# EAGLE board panel_oshpark_femtoBeacon_r2.0.0 (EAGLE 7.5.0), part 1 of 14
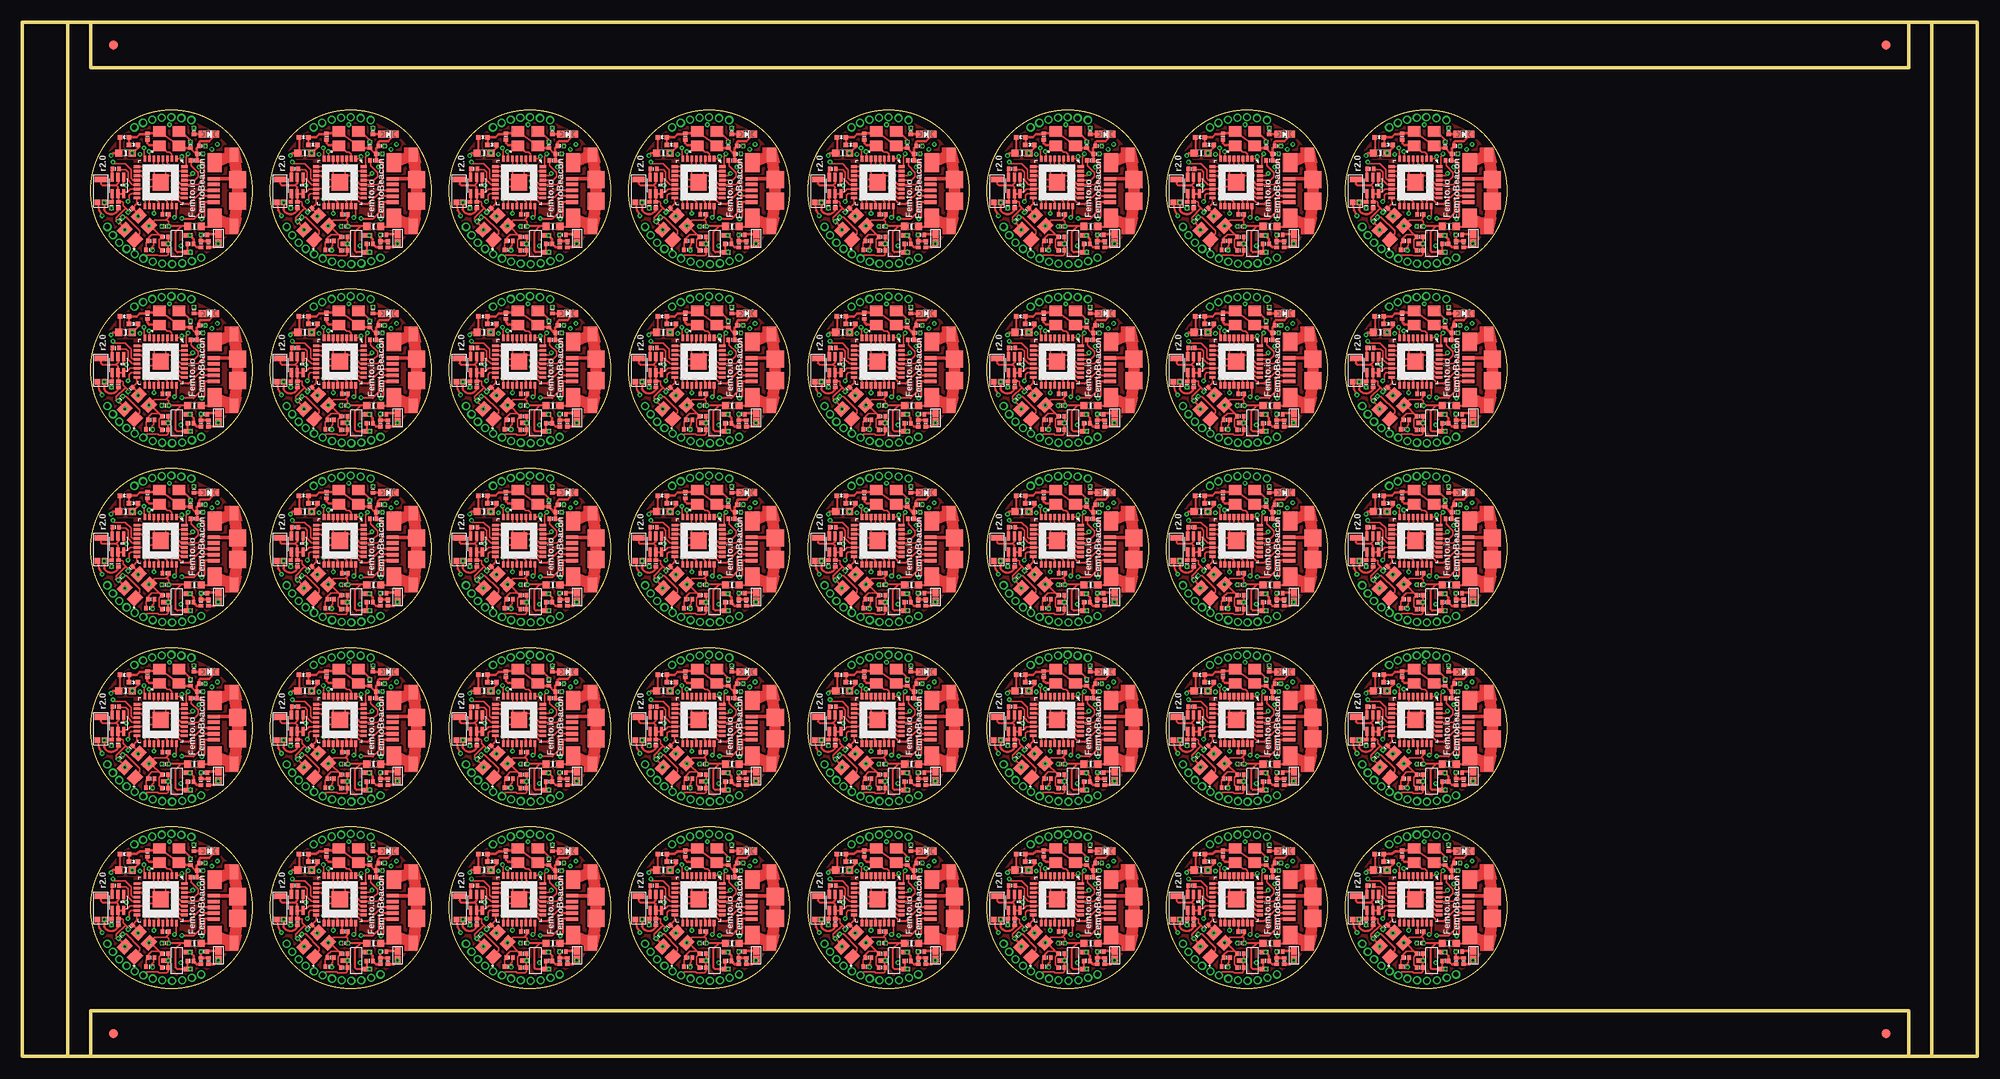
[diagram p0: board, top side]
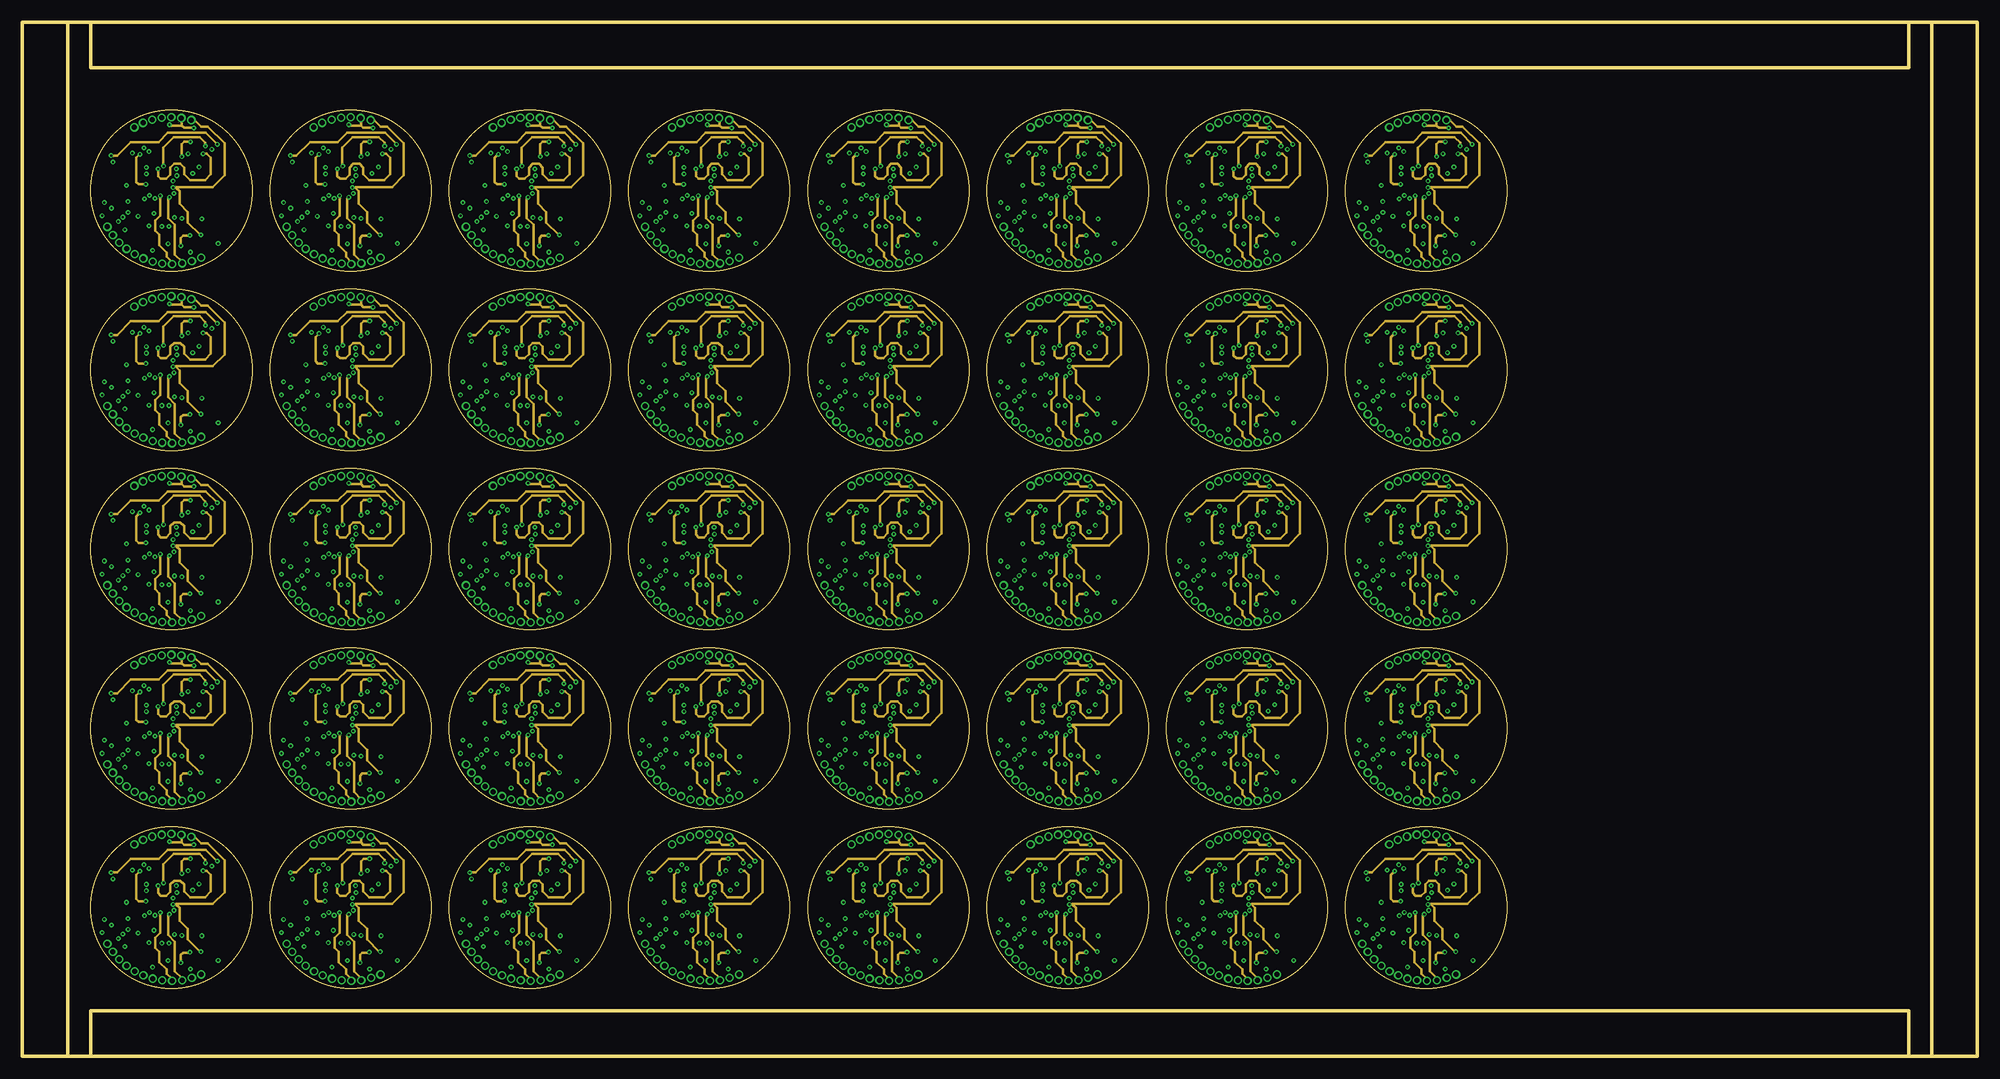
[diagram p1: board, inner layer Route2]
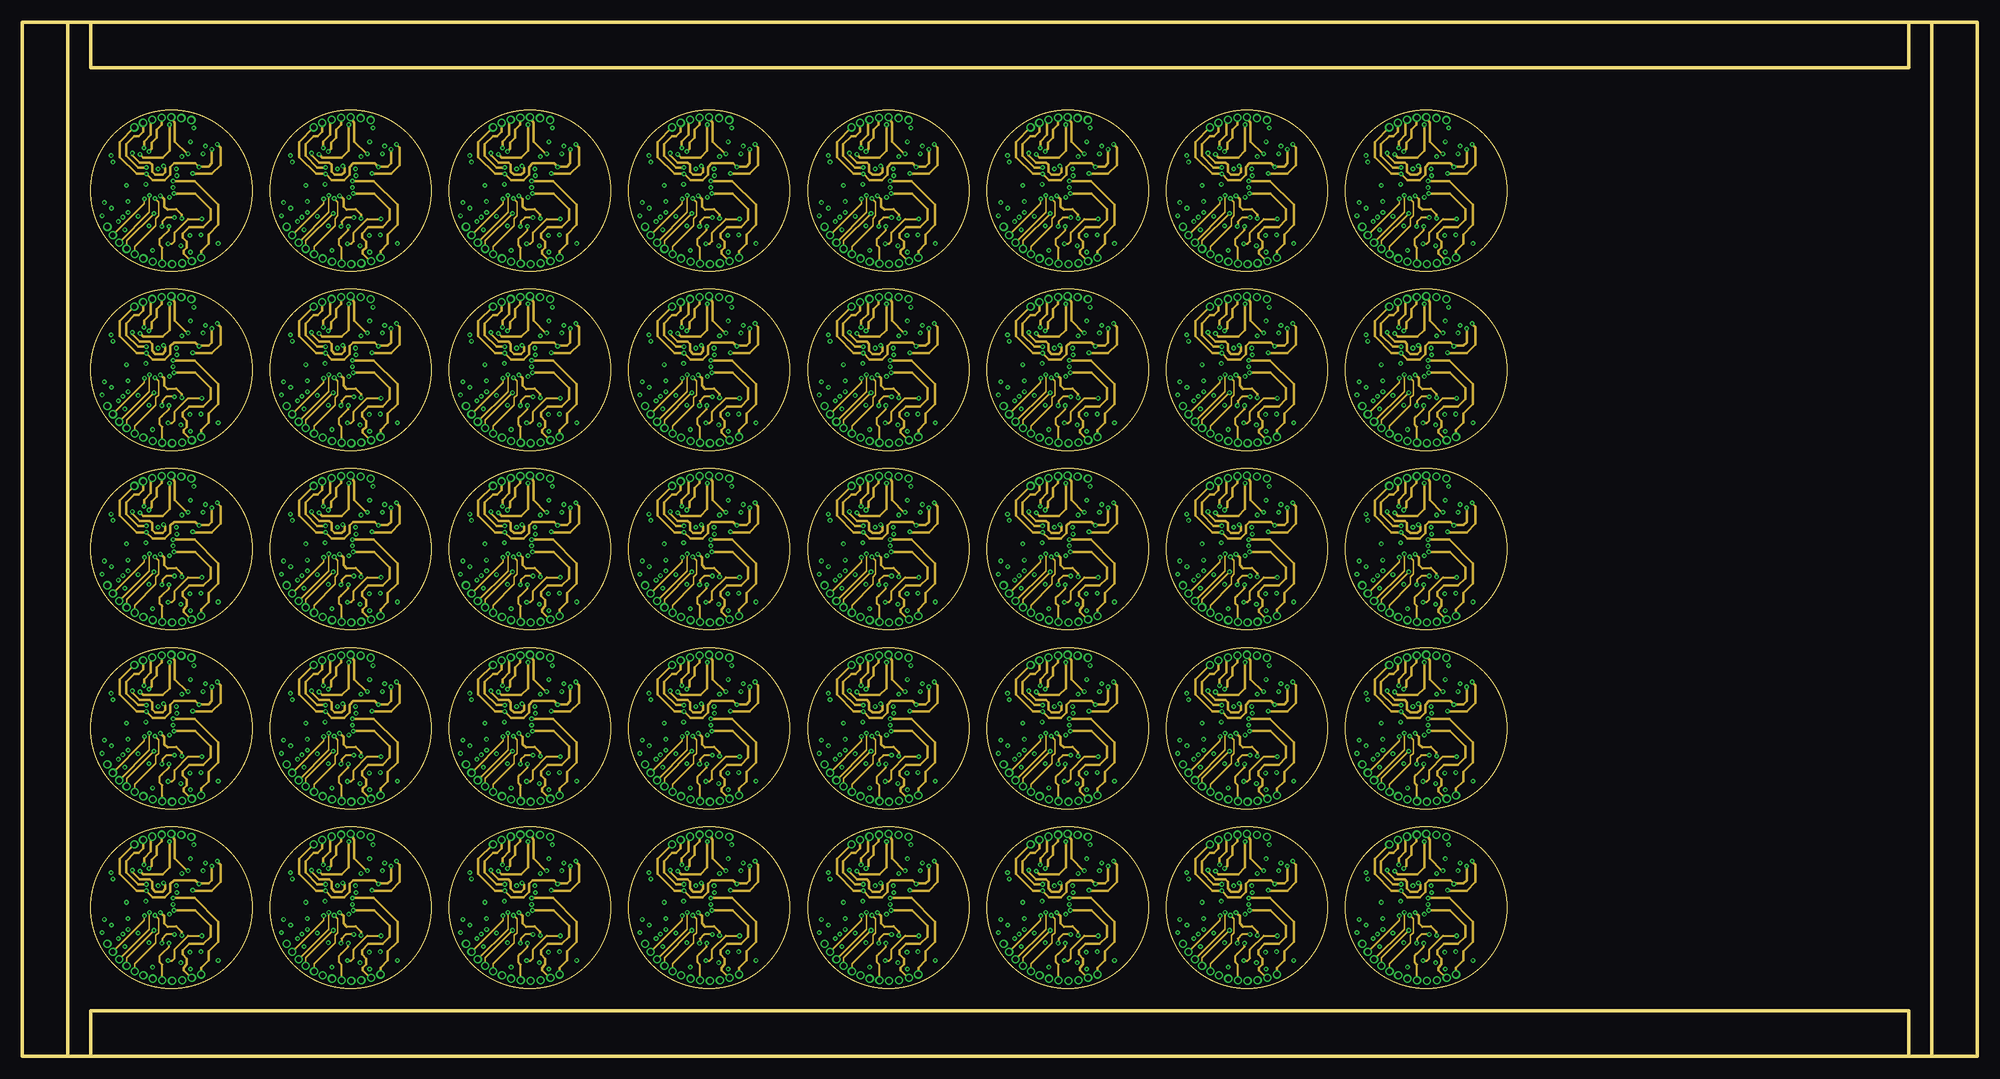
[diagram p2: board, inner layer Route15]
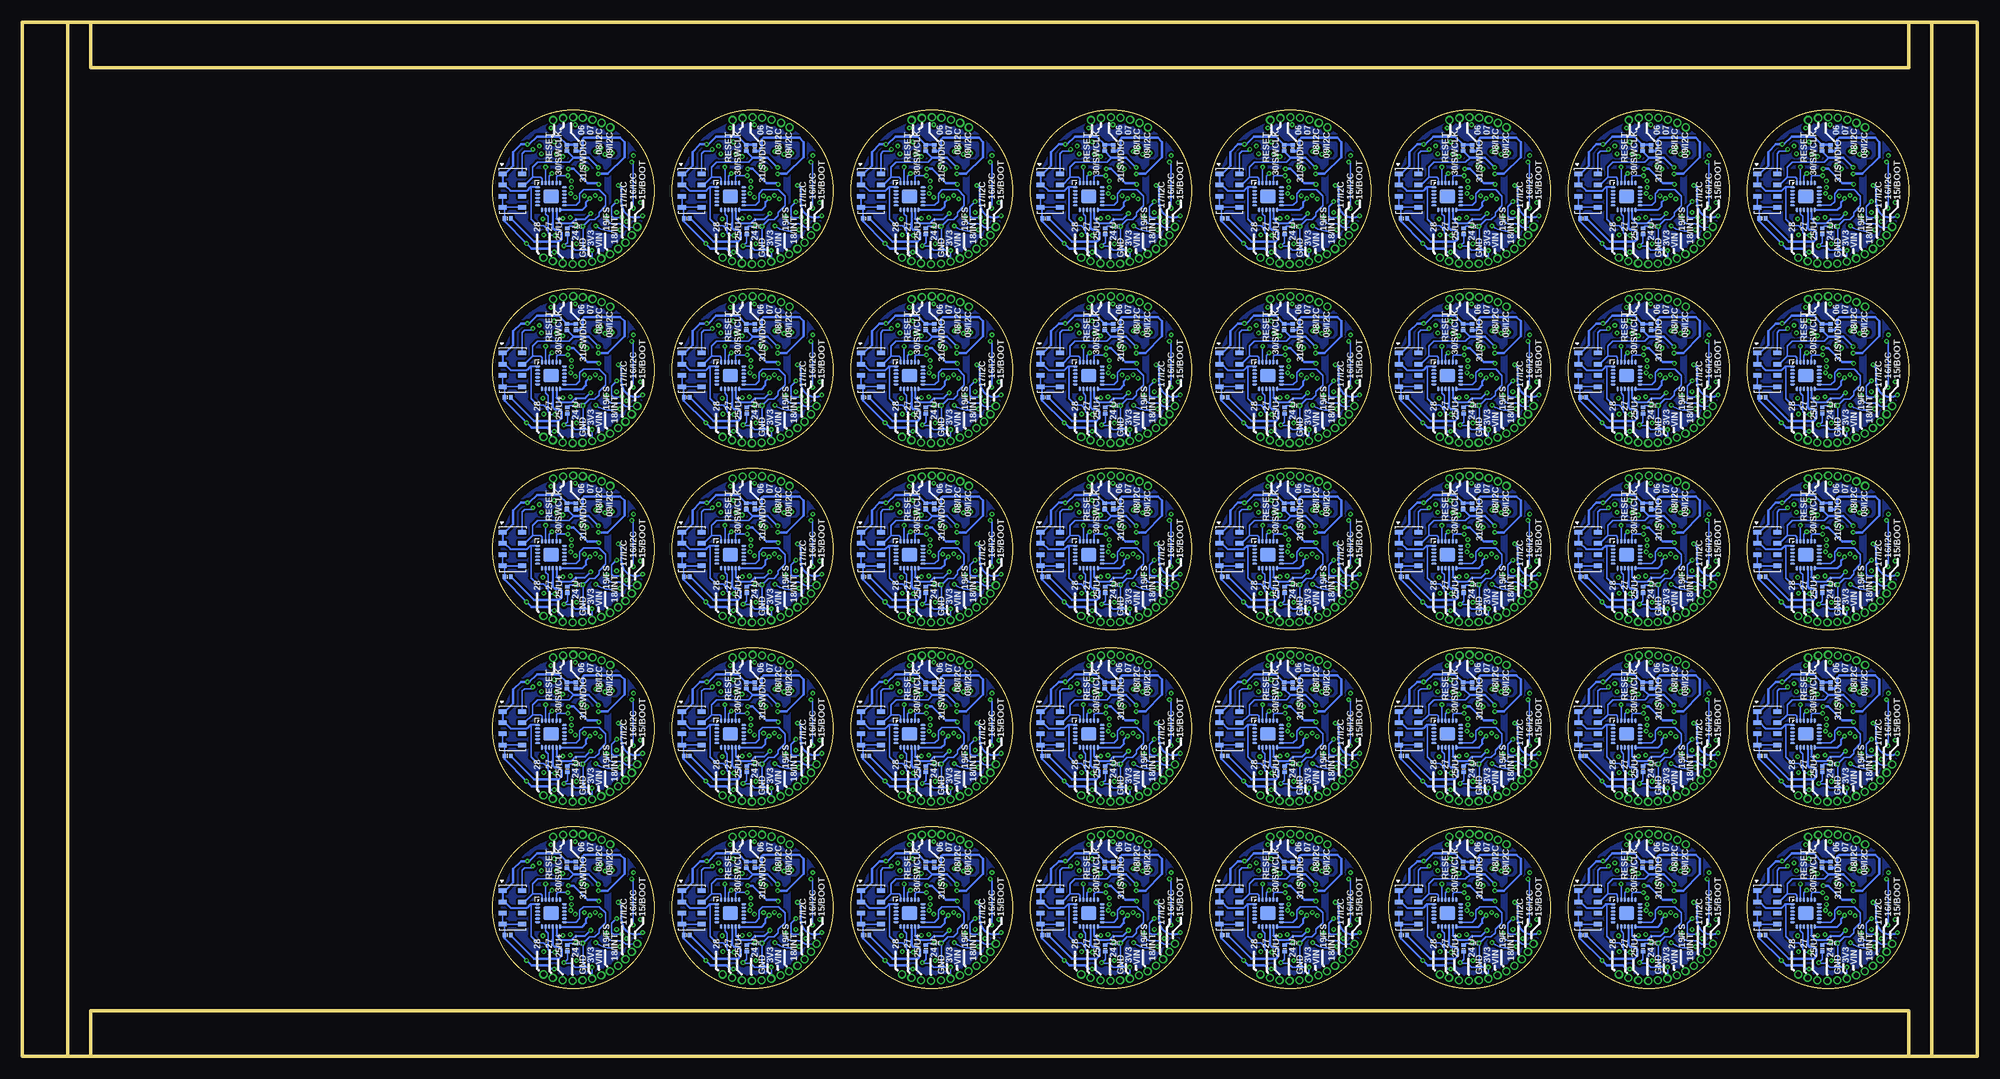
[diagram p3: board, bottom side, seen from below]

Size 218.08 x 115.39 mm. Coordinates in mm from the lower left corner, seen from the top.
Outline: 5.08,0 0,0 0,115.39 5.08,115.39
Outline: 5.08,0 5.08,115.39
Outline: 213,0 218.08,0 218.08,115.39 213,115.39
Outline: 213,0 213,115.39
Outline: 5.08,0 213,0
Outline: 5.08,115.39 213,115.39
Outline: 7.62,5.08 7.62,0 210.46,0 210.46,5.08 7.62,5.08
Outline: 7.62,115.39 7.62,110.31 210.46,110.31 210.46,115.39 7.62,115.39
Outline: circle at 16.62,16.62 radius 9
Outline: circle at 36.62,16.62 radius 9
Outline: circle at 56.62,16.62 radius 9
Outline: circle at 76.62,16.62 radius 9
Outline: circle at 96.62,16.62 radius 9
Outline: circle at 116.62,16.62 radius 9
Outline: circle at 136.62,16.62 radius 9
Outline: circle at 156.62,16.62 radius 9
Outline: circle at 16.62,36.62 radius 9
Outline: circle at 36.62,36.62 radius 9
Outline: circle at 56.62,36.62 radius 9
Outline: circle at 76.62,36.62 radius 9
Outline: circle at 96.62,36.62 radius 9
Outline: circle at 116.62,36.62 radius 9
Outline: circle at 136.62,36.62 radius 9
Outline: circle at 156.62,36.62 radius 9
Outline: circle at 16.62,56.62 radius 9
Outline: circle at 36.62,56.62 radius 9
Outline: circle at 56.62,56.62 radius 9
Outline: circle at 76.62,56.62 radius 9
Copper layers (1+2*15+16): Top 0.035mm / dielectric 0.7mm / Route2 0.035mm / dielectric 0.15mm / Route15 0.035mm / dielectric 0.2mm / Bottom 0.035mm
Design rules "AQS_custom_4layer": minimum track width 5mil, minimum drill 5mil, track to track 6mil, track to pad 6mil, pad to pad 6mil, via to via 6mil, smd to smd 1mil, copper to edge 15mil, drill to drill 6mil, minimum pad ring 7mil, minimum via ring 3mil, stop-mask expansion 2mil, vias tented up to drill 10mil, thermal gap 10mil

## Footprints (pad centres in the part's own frame; a part is rotated, then mirrored left to right if it is on the bottom)
ANT_BAR = smd 0.62 x 0.61: 1 -1.3,0.37; 2 -1.3,-0.38 | smd 0.62 x 1.36: 3 1.3,0
SPST_SMD = smd 0.889 x 0.699: 1 -0.508,0; 2 0.508,0
PART = smd 0.4 x 0.5: 1 -0.35,0; 2 0.35,0
_0402MP = smd 0.5 x 0.5: 1 -0.508,0; 2 0.508,0
_0603MP = smd 0.8 x 0.8: 1 -0.762,0; 2 0.762,0
FIDUCIAL_1MM = smd 1 x 1: 1 0,0
MCP1700T-3302E/TT = smd 0.5 x 1: GND -0.95,-1.25; VIN 0,1.25; VOUT 0.95,-1.25
CHIPLED_0603_NOOUTLINE = smd 0.8 x 0.8: A 0,-0.75; C 0,0.75
TSX-3225 = smd 1.4 x 1.15: 1 -1.1,-0.8; 2 1.1,-0.8; 3 1.1,0.8; 4 -1.1,0.8
1X1_ROUND = drill 0.559 pad 0.864: P$1 0,0
QFN_3X3MM = smd 0.6 x 0.25: P$1 -1.5,1; P$2 -1.5,0.6; P$3 -1.5,0.2; P$4 -1.5,-0.2; P$5 -1.5,-0.6; P$6 -1.5,-1; P$13 1.5,-1; P$14 1.5,-0.6; P$15 1.5,-0.2; P$16 1.5,0.2; P$17 1.5,0.6; P$18 1.5,1 | smd 0.25 x 0.6: P$7 -1,-1.5; P$8 -0.6,-1.5; P$9 -0.2,-1.5; P$10 0.2,-1.5; P$11 0.6,-1.5; P$12 1,-1.5; P$19 1,1.5; P$20 0.6,1.5; P$21 0.2,1.5; P$22 -0.2,1.5; P$23 -0.6,1.5; P$24 -1,1.5 | smd 1.7 x 1.54: P$25 0,0
0805_BALUN = smd 1 x 0.35: 1 -0.9,0.65; 2 -0.9,0; 3 -0.9,-0.65; 4 0.9,-0.65; 5 0.9,0; 6 0.9,0.65
MS5611-01BA03 = smd 0.9 x 0.5: 1 -1.1,1.875; 2 -1.1,0.625; 3 -1.1,-0.625; 4 -1.1,-1.875; 5 1.1,-1.875; 6 1.1,-0.625; 7 1.1,0.625; 8 1.1,1.875
QFN32 = smd 0.7 x 0.3: 1 -2.65,1.75; 2 -2.65,1.25; 3 -2.65,0.75; 4 -2.65,0.25; 5 -2.65,-0.25; 6 -2.65,-0.75; 7 -2.65,-1.25; 8 -2.65,-1.75; 17 2.65,-1.75; 18 2.65,-1.25; 19 2.65,-0.75; 20 2.65,-0.25; 21 2.65,0.25; 22 2.65,0.75; 23 2.65,1.25; 24 2.65,1.75 | smd 0.3 x 0.7: 9 -1.75,-2.65; 10 -1.25,-2.65; 11 -0.75,-2.65; 12 -0.25,-2.65; 13 0.25,-2.65; 14 0.75,-2.65; 15 1.25,-2.65; 16 1.75,-2.65; 25 1.75,2.65; 26 1.25,2.65; 27 0.75,2.65; 28 0.25,2.65; 29 -0.25,2.65; 30 -0.75,2.65; 31 -1.25,2.65; 32 -1.75,2.65 | smd 1.8 x 1.8: 33 0,0
USB_MICROB_PACKAGE = smd 0.4 x 1.35: 1 -1.3,1.47; 2 -0.64,1.47; 3 0,1.47; 4 0.66,1.47; 5 1.3,1.47 | smd 2.1 x 1.6: 6 -3.1,1.35; 11 3.1,1.35 | smd 1.6 x 1: 7 -4,-0.8; 10 4,-0.8 | smd 1.9 x 1.9: 8 -1.2,-1.2; 9 1.2,-1.2

## Placement (x,y rotation side)
ANT1  PULSE_ANT_2.4GHZ  [ANT_BAR]  8.76,16.59 90 top
ANT2  PULSE_ANT_2.4GHZ  [ANT_BAR]  28.76,16.59 90 top
ANT3  PULSE_ANT_2.4GHZ  [ANT_BAR]  48.76,16.59 90 top
ANT4  PULSE_ANT_2.4GHZ  [ANT_BAR]  68.76,16.59 90 top
ANT5  PULSE_ANT_2.4GHZ  [ANT_BAR]  88.76,16.59 90 top
ANT6  PULSE_ANT_2.4GHZ  [ANT_BAR]  108.76,16.59 90 top
ANT7  PULSE_ANT_2.4GHZ  [ANT_BAR]  128.76,16.59 90 top
ANT8  PULSE_ANT_2.4GHZ  [ANT_BAR]  148.76,16.59 90 top
ANT9  PULSE_ANT_2.4GHZ  [ANT_BAR]  8.76,36.59 90 top
ANT10  PULSE_ANT_2.4GHZ  [ANT_BAR]  28.76,36.59 90 top
ANT11  PULSE_ANT_2.4GHZ  [ANT_BAR]  48.76,36.59 90 top
ANT12  PULSE_ANT_2.4GHZ  [ANT_BAR]  68.76,36.59 90 top
ANT13  PULSE_ANT_2.4GHZ  [ANT_BAR]  88.76,36.59 90 top
ANT14  PULSE_ANT_2.4GHZ  [ANT_BAR]  108.76,36.59 90 top
ANT15  PULSE_ANT_2.4GHZ  [ANT_BAR]  128.76,36.59 90 top
ANT16  PULSE_ANT_2.4GHZ  [ANT_BAR]  148.76,36.59 90 top
ANT17  PULSE_ANT_2.4GHZ  [ANT_BAR]  8.76,56.59 90 top
ANT18  PULSE_ANT_2.4GHZ  [ANT_BAR]  28.76,56.59 90 top
ANT19  PULSE_ANT_2.4GHZ  [ANT_BAR]  48.76,56.59 90 top
ANT20  PULSE_ANT_2.4GHZ  [ANT_BAR]  68.76,56.59 90 top
ANT21  PULSE_ANT_2.4GHZ  [ANT_BAR]  88.76,56.59 90 top
ANT22  PULSE_ANT_2.4GHZ  [ANT_BAR]  108.76,56.59 90 top
ANT23  PULSE_ANT_2.4GHZ  [ANT_BAR]  128.76,56.59 90 top
ANT24  PULSE_ANT_2.4GHZ  [ANT_BAR]  148.76,56.59 90 top
ANT25  PULSE_ANT_2.4GHZ  [ANT_BAR]  8.76,76.59 90 top
ANT26  PULSE_ANT_2.4GHZ  [ANT_BAR]  28.76,76.59 90 top
ANT27  PULSE_ANT_2.4GHZ  [ANT_BAR]  48.76,76.59 90 top
ANT28  PULSE_ANT_2.4GHZ  [ANT_BAR]  68.76,76.59 90 top
ANT29  PULSE_ANT_2.4GHZ  [ANT_BAR]  88.76,76.59 90 top
ANT30  PULSE_ANT_2.4GHZ  [ANT_BAR]  108.76,76.59 90 top
ANT31  PULSE_ANT_2.4GHZ  [ANT_BAR]  128.76,76.59 90 top
ANT32  PULSE_ANT_2.4GHZ  [ANT_BAR]  148.76,76.59 90 top
ANT33  PULSE_ANT_2.4GHZ  [ANT_BAR]  8.76,96.59 90 top
ANT34  PULSE_ANT_2.4GHZ  [ANT_BAR]  28.76,96.59 90 top
ANT35  PULSE_ANT_2.4GHZ  [ANT_BAR]  48.76,96.59 90 top
ANT36  PULSE_ANT_2.4GHZ  [ANT_BAR]  68.76,96.59 90 top
ANT37  PULSE_ANT_2.4GHZ  [ANT_BAR]  88.76,96.59 90 top
ANT38  PULSE_ANT_2.4GHZ  [ANT_BAR]  108.76,96.59 90 top
ANT39  PULSE_ANT_2.4GHZ  [ANT_BAR]  128.76,96.59 90 top
ANT40  PULSE_ANT_2.4GHZ  [ANT_BAR]  148.76,96.59 90 top
BTN  DNP  [SPST_SMD]  21.87,11.28 270 top
BTN1  DNP  [SPST_SMD]  41.87,11.28 270 top
BTN2  DNP  [SPST_SMD]  61.87,11.28 270 top
BTN3  DNP  [SPST_SMD]  81.87,11.28 270 top
BTN4  DNP  [SPST_SMD]  101.87,11.28 270 top
BTN5  DNP  [SPST_SMD]  121.87,11.28 270 top
BTN6  DNP  [SPST_SMD]  141.87,11.28 270 top
BTN7  DNP  [SPST_SMD]  161.87,11.28 270 top
BTN8  DNP  [SPST_SMD]  21.87,31.28 270 top
BTN9  DNP  [SPST_SMD]  41.87,31.28 270 top
BTN10  DNP  [SPST_SMD]  61.87,31.28 270 top
BTN11  DNP  [SPST_SMD]  81.87,31.28 270 top
BTN12  DNP  [SPST_SMD]  101.87,31.28 270 top
BTN13  DNP  [SPST_SMD]  121.87,31.28 270 top
BTN14  DNP  [SPST_SMD]  141.87,31.28 270 top
BTN15  DNP  [SPST_SMD]  161.87,31.28 270 top
BTN16  DNP  [SPST_SMD]  21.87,51.28 270 top
BTN17  DNP  [SPST_SMD]  41.87,51.28 270 top
BTN18  DNP  [SPST_SMD]  61.87,51.28 270 top
BTN19  DNP  [SPST_SMD]  81.87,51.28 270 top
BTN20  DNP  [SPST_SMD]  101.87,51.28 270 top
BTN21  DNP  [SPST_SMD]  121.87,51.28 270 top
BTN22  DNP  [SPST_SMD]  141.87,51.28 270 top
BTN23  DNP  [SPST_SMD]  161.87,51.28 270 top
BTN24  DNP  [SPST_SMD]  21.87,71.28 270 top
BTN25  DNP  [SPST_SMD]  41.87,71.28 270 top
BTN26  DNP  [SPST_SMD]  61.87,71.28 270 top
BTN27  DNP  [SPST_SMD]  81.87,71.28 270 top
BTN28  DNP  [SPST_SMD]  101.87,71.28 270 top
BTN29  DNP  [SPST_SMD]  121.87,71.28 270 top
BTN30  DNP  [SPST_SMD]  141.87,71.28 270 top
BTN31  DNP  [SPST_SMD]  161.87,71.28 270 top
BTN32  DNP  [SPST_SMD]  21.87,91.28 270 top
BTN33  DNP  [SPST_SMD]  41.87,91.28 270 top
BTN34  DNP  [SPST_SMD]  61.87,91.28 270 top
BTN35  DNP  [SPST_SMD]  81.87,91.28 270 top
BTN36  DNP  [SPST_SMD]  101.87,91.28 270 top
BTN37  DNP  [SPST_SMD]  121.87,91.28 270 top
BTN38  DNP  [SPST_SMD]  141.87,91.28 270 top
BTN39  DNP  [SPST_SMD]  161.87,91.28 270 top
C1  0.1uF  [PART]  20.78,10.64 270 top
C2  0.1uF  [PART]  15.98,13.94 0 top
C3  10pF  [PART]  10.95,13.41 45 top
C4  10pF  [PART]  12.04,14.43 225 top
C5  2.2uF  [PART]  18.75,10.67 180 top
C6  2.2uF  [PART]  15.9,11.45 180 top
C7  0.47uF  [PART]  15.9,9.93 180 top
C8  0.1uF  [PART]  20.07,21.59 180 top
C9  0.1uF  [PART]  19.13,19.99 0 top
C10  0.1uF  [PART]  14.38,11.02 180 top
C11  22pF, C0G, 5%  [PART]  10.41,19.05 180 top
C12  22pF, C0G, 5%  [PART]  9.93,15.01 90 top
C13  DNP  [PART]  10.69,15.01 90 top
C14  9pF  [PART]  13.94,22.66 270 top
C15  9pF  [PART]  18.75,21.72 270 top
C16  0.1uF  [PART]  15.95,12.64 0 top
C17  0.1uF  [PART]  19.81,20.73 180 top
C18  0.1uF  [PART]  40.78,10.64 270 top
C19  0.1uF  [PART]  35.98,13.94 0 top
C20  2.2uF  [PART]  38.75,10.67 180 top
C21  10uF  [_0402MP]  11.38,22.58 180 top
C22  10uF  [_0402MP]  12.4,21.74 0 top
C23  2.2uF  [PART]  35.9,11.45 180 top
C24  0.47uF  [PART]  35.9,9.93 180 top
C25  0.1uF  [PART]  37.27,12.07 90 bottom
C26  0.1uF  [PART]  40.07,21.59 180 top
C27  0.1uF  [PART]  39.13,19.99 0 top
C28  0.1uF  [PART]  35.95,12.64 0 top
C29  0.1uF  [PART]  17.27,12.07 90 bottom
C30  0.1uF  [PART]  15.95,12.64 0 bottom
C31  10nF  [PART]  14.15,10.01 0 top
C32  0.1uF  [PART]  23.95,13.54 180 bottom
C33  0.1uF  [PART]  39.81,20.73 180 top
C34  10uF  [_0402MP]  31.38,22.58 180 top
C35  10uF  [_0402MP]  32.4,21.74 0 top
C36  0.1uF  [PART]  34.38,11.02 180 top
C37  10pF  [PART]  30.95,13.41 45 top
C38  10pF  [PART]  32.04,14.43 225 top
C39  22pF, C0G, 5%  [PART]  30.41,19.05 180 top
C40  22pF, C0G, 5%  [PART]  29.93,15.01 90 top
C41  DNP  [PART]  30.69,15.01 90 top
C42  9pF  [PART]  33.94,22.66 270 top
C43  9pF  [PART]  38.75,21.72 270 top
C44  10nF  [PART]  34.15,10.01 0 top
C45  0.1uF  [PART]  35.95,12.64 0 bottom
C46  0.1uF  [PART]  43.95,13.54 180 bottom
C47  0.1uF  [PART]  60.78,10.64 270 top
C48  0.1uF  [PART]  55.98,13.94 0 top
C49  2.2uF  [PART]  58.75,10.67 180 top
C50  2.2uF  [PART]  55.9,11.45 180 top
C51  0.47uF  [PART]  55.9,9.93 180 top
C52  0.1uF  [PART]  57.27,12.07 90 bottom
C53  0.1uF  [PART]  60.07,21.59 180 top
C54  0.1uF  [PART]  59.13,19.99 0 top
C55  0.1uF  [PART]  55.95,12.64 0 top
C56  0.1uF  [PART]  59.81,20.73 180 top
C57  10uF  [_0402MP]  51.38,22.58 180 top
C58  10uF  [_0402MP]  52.4,21.74 0 top
C59  0.1uF  [PART]  54.38,11.02 180 top
C60  10pF  [PART]  50.95,13.41 45 top
C61  10pF  [PART]  52.04,14.43 225 top
C62  22pF, C0G, 5%  [PART]  50.41,19.05 180 top
C63  22pF, C0G, 5%  [PART]  49.93,15.01 90 top
C64  DNP  [PART]  50.69,15.01 90 top
C65  9pF  [PART]  53.94,22.66 270 top
C66  9pF  [PART]  58.75,21.72 270 top
C67  10nF  [PART]  54.15,10.01 0 top
C68  0.1uF  [PART]  55.95,12.64 0 bottom
C69  0.1uF  [PART]  63.95,13.54 180 bottom
C70  0.1uF  [PART]  80.78,10.64 270 top
C71  0.1uF  [PART]  75.98,13.94 0 top
C72  2.2uF  [PART]  78.75,10.67 180 top
C73  2.2uF  [PART]  75.9,11.45 180 top
C74  0.47uF  [PART]  75.9,9.93 180 top
C75  0.1uF  [PART]  77.27,12.07 90 bottom
C76  0.1uF  [PART]  80.07,21.59 180 top
C77  0.1uF  [PART]  79.13,19.99 0 top
C78  0.1uF  [PART]  75.95,12.64 0 top
C79  0.1uF  [PART]  79.81,20.73 180 top
C80  10uF  [_0402MP]  71.38,22.58 180 top
C81  10uF  [_0402MP]  72.4,21.74 0 top
C82  0.1uF  [PART]  74.38,11.02 180 top
C83  10pF  [PART]  70.95,13.41 45 top
C84  10pF  [PART]  72.04,14.43 225 top
C85  22pF, C0G, 5%  [PART]  70.41,19.05 180 top
C86  22pF, C0G, 5%  [PART]  69.93,15.01 90 top
C87  DNP  [PART]  70.69,15.01 90 top
C88  9pF  [PART]  73.94,22.66 270 top
C89  9pF  [PART]  78.75,21.72 270 top
C90  10nF  [PART]  74.15,10.01 0 top
C91  0.1uF  [PART]  75.95,12.64 0 bottom
C92  0.1uF  [PART]  83.95,13.54 180 bottom
C93  0.1uF  [PART]  100.78,10.64 270 top
C94  0.1uF  [PART]  95.98,13.94 0 top
C95  2.2uF  [PART]  98.75,10.67 180 top
C96  2.2uF  [PART]  95.9,11.45 180 top
C97  0.47uF  [PART]  95.9,9.93 180 top
C98  0.1uF  [PART]  97.27,12.07 90 bottom
C99  0.1uF  [PART]  100.07,21.59 180 top
C100  0.1uF  [PART]  99.13,19.99 0 top
C101  0.1uF  [PART]  95.95,12.64 0 top
C102  0.1uF  [PART]  99.81,20.73 180 top
C103  10uF  [_0402MP]  91.38,22.58 180 top
C104  10uF  [_0402MP]  92.4,21.74 0 top
C105  0.1uF  [PART]  94.38,11.02 180 top
C106  10pF  [PART]  90.95,13.41 45 top
C107  10pF  [PART]  92.04,14.43 225 top
C108  22pF, C0G, 5%  [PART]  90.41,19.05 180 top
C109  22pF, C0G, 5%  [PART]  89.93,15.01 90 top
C110  DNP  [PART]  90.69,15.01 90 top
C111  9pF  [PART]  93.94,22.66 270 top
C112  9pF  [PART]  98.75,21.72 270 top
C113  10nF  [PART]  94.15,10.01 0 top
C114  0.1uF  [PART]  95.95,12.64 0 bottom
C115  0.1uF  [PART]  103.95,13.54 180 bottom
C116  0.1uF  [PART]  120.78,10.64 270 top
C117  0.1uF  [PART]  115.98,13.94 0 top
C118  2.2uF  [PART]  118.75,10.67 180 top
C119  2.2uF  [PART]  115.9,11.45 180 top
C120  0.47uF  [PART]  115.9,9.93 180 top
C121  0.1uF  [PART]  117.27,12.07 90 bottom
C122  0.1uF  [PART]  120.07,21.59 180 top
C123  0.1uF  [PART]  119.13,19.99 0 top
C124  0.1uF  [PART]  115.95,12.64 0 top
C125  0.1uF  [PART]  119.81,20.73 180 top
C126  10uF  [_0402MP]  111.38,22.58 180 top
C127  10uF  [_0402MP]  112.4,21.74 0 top
C128  0.1uF  [PART]  114.38,11.02 180 top
C129  10pF  [PART]  110.95,13.41 45 top
C130  10pF  [PART]  112.04,14.43 225 top
C131  22pF, C0G, 5%  [PART]  110.41,19.05 180 top
C132  22pF, C0G, 5%  [PART]  109.93,15.01 90 top
C133  DNP  [PART]  110.69,15.01 90 top
C134  9pF  [PART]  113.94,22.66 270 top
C135  9pF  [PART]  118.75,21.72 270 top
C136  10nF  [PART]  114.15,10.01 0 top
C137  0.1uF  [PART]  115.95,12.64 0 bottom
C138  0.1uF  [PART]  123.95,13.54 180 bottom
C139  0.1uF  [PART]  140.78,10.64 270 top
C140  0.1uF  [PART]  135.98,13.94 0 top
C141  2.2uF  [PART]  138.75,10.67 180 top
C142  2.2uF  [PART]  135.9,11.45 180 top
C143  0.47uF  [PART]  135.9,9.93 180 top
C144  0.1uF  [PART]  137.27,12.07 90 bottom
C145  0.1uF  [PART]  140.07,21.59 180 top
C146  0.1uF  [PART]  139.13,19.99 0 top
C147  0.1uF  [PART]  135.95,12.64 0 top
C148  0.1uF  [PART]  139.81,20.73 180 top
C149  10uF  [_0402MP]  131.38,22.58 180 top
C150  10uF  [_0402MP]  132.4,21.74 0 top
C151  0.1uF  [PART]  134.38,11.02 180 top
C152  10pF  [PART]  130.95,13.41 45 top
C153  10pF  [PART]  132.04,14.43 225 top
C154  22pF, C0G, 5%  [PART]  130.41,19.05 180 top
C155  22pF, C0G, 5%  [PART]  129.93,15.01 90 top
C156  DNP  [PART]  130.69,15.01 90 top
C157  9pF  [PART]  133.94,22.66 270 top
C158  9pF  [PART]  138.75,21.72 270 top
C159  10nF  [PART]  134.15,10.01 0 top
C160  0.1uF  [PART]  135.95,12.64 0 bottom
C161  0.1uF  [PART]  143.95,13.54 180 bottom
C162  0.1uF  [PART]  160.78,10.64 270 top
C163  0.1uF  [PART]  155.98,13.94 0 top
C164  2.2uF  [PART]  158.75,10.67 180 top
C165  2.2uF  [PART]  155.9,11.45 180 top
C166  0.47uF  [PART]  155.9,9.93 180 top
C167  0.1uF  [PART]  157.27,12.07 90 bottom
C168  0.1uF  [PART]  160.07,21.59 180 top
C169  0.1uF  [PART]  159.13,19.99 0 top
C170  0.1uF  [PART]  155.95,12.64 0 top
C171  0.1uF  [PART]  159.81,20.73 180 top
C172  10uF  [_0402MP]  151.38,22.58 180 top
C173  10uF  [_0402MP]  152.4,21.74 0 top
C174  0.1uF  [PART]  154.38,11.02 180 top
C175  10pF  [PART]  150.95,13.41 45 top
C176  10pF  [PART]  152.04,14.43 225 top
C177  22pF, C0G, 5%  [PART]  150.41,19.05 180 top
C178  22pF, C0G, 5%  [PART]  149.93,15.01 90 top
C179  DNP  [PART]  150.69,15.01 90 top
C180  9pF  [PART]  153.94,22.66 270 top
C181  9pF  [PART]  158.75,21.72 270 top
C182  10nF  [PART]  154.15,10.01 0 top
C183  0.1uF  [PART]  155.95,12.64 0 bottom
C184  0.1uF  [PART]  163.95,13.54 180 bottom
C185  0.1uF  [PART]  20.78,30.64 270 top
C186  0.1uF  [PART]  15.98,33.94 0 top
C187  2.2uF  [PART]  18.75,30.67 180 top
C188  2.2uF  [PART]  15.9,31.45 180 top
C189  0.47uF  [PART]  15.9,29.93 180 top
C190  0.1uF  [PART]  17.27,32.07 90 bottom
C191  0.1uF  [PART]  20.07,41.59 180 top
C192  0.1uF  [PART]  19.13,39.99 0 top
C193  0.1uF  [PART]  15.95,32.64 0 top
C194  0.1uF  [PART]  19.81,40.73 180 top
C195  10uF  [_0402MP]  11.38,42.58 180 top
C196  10uF  [_0402MP]  12.4,41.74 0 top
C197  0.1uF  [PART]  14.38,31.02 180 top
C198  10pF  [PART]  10.95,33.41 45 top
C199  10pF  [PART]  12.04,34.43 225 top
C200  22pF, C0G, 5%  [PART]  10.41,39.05 180 top
C201  22pF, C0G, 5%  [PART]  9.93,35.01 90 top
C202  DNP  [PART]  10.69,35.01 90 top
C203  9pF  [PART]  13.94,42.66 270 top
C204  9pF  [PART]  18.75,41.72 270 top
C205  10nF  [PART]  14.15,30.01 0 top
C206  0.1uF  [PART]  15.95,32.64 0 bottom
C207  0.1uF  [PART]  23.95,33.54 180 bottom
C208  0.1uF  [PART]  40.78,30.64 270 top
C209  0.1uF  [PART]  35.98,33.94 0 top
C210  2.2uF  [PART]  38.75,30.67 180 top
C211  2.2uF  [PART]  35.9,31.45 180 top
C212  0.47uF  [PART]  35.9,29.93 180 top
C213  0.1uF  [PART]  37.27,32.07 90 bottom
C214  0.1uF  [PART]  40.07,41.59 180 top
C215  0.1uF  [PART]  39.13,39.99 0 top
C216  0.1uF  [PART]  35.95,32.64 0 top
C217  0.1uF  [PART]  39.81,40.73 180 top
C218  10uF  [_0402MP]  31.38,42.58 180 top
C219  10uF  [_0402MP]  32.4,41.74 0 top
C220  0.1uF  [PART]  34.38,31.02 180 top
C221  10pF  [PART]  30.95,33.41 45 top
C222  10pF  [PART]  32.04,34.43 225 top
C223  22pF, C0G, 5%  [PART]  30.41,39.05 180 top
C224  22pF, C0G, 5%  [PART]  29.93,35.01 90 top
C225  DNP  [PART]  30.69,35.01 90 top
C226  9pF  [PART]  33.94,42.66 270 top
C227  9pF  [PART]  38.75,41.72 270 top
C228  10nF  [PART]  34.15,30.01 0 top
C229  0.1uF  [PART]  35.95,32.64 0 bottom
C230  0.1uF  [PART]  43.95,33.54 180 bottom
C231  0.1uF  [PART]  60.78,30.64 270 top
C232  0.1uF  [PART]  55.98,33.94 0 top
C233  2.2uF  [PART]  58.75,30.67 180 top
C234  2.2uF  [PART]  55.9,31.45 180 top
C235  0.47uF  [PART]  55.9,29.93 180 top
C236  0.1uF  [PART]  57.27,32.07 90 bottom
C237  0.1uF  [PART]  60.07,41.59 180 top
C238  0.1uF  [PART]  59.13,39.99 0 top
C239  0.1uF  [PART]  55.95,32.64 0 top
C240  0.1uF  [PART]  59.81,40.73 180 top
C241  10uF  [_0402MP]  51.38,42.58 180 top
C242  10uF  [_0402MP]  52.4,41.74 0 top
C243  0.1uF  [PART]  54.38,31.02 180 top
C244  10pF  [PART]  50.95,33.41 45 top
C245  10pF  [PART]  52.04,34.43 225 top
C246  22pF, C0G, 5%  [PART]  50.41,39.05 180 top
C247  22pF, C0G, 5%  [PART]  49.93,35.01 90 top
C248  DNP  [PART]  50.69,35.01 90 top
C249  9pF  [PART]  53.94,42.66 270 top
C250  9pF  [PART]  58.75,41.72 270 top
C251  10nF  [PART]  54.15,30.01 0 top
C252  0.1uF  [PART]  55.95,32.64 0 bottom
C253  0.1uF  [PART]  63.95,33.54 180 bottom
C254  0.1uF  [PART]  80.78,30.64 270 top
C255  0.1uF  [PART]  75.98,33.94 0 top
C256  2.2uF  [PART]  78.75,30.67 180 top
C257  2.2uF  [PART]  75.9,31.45 180 top
C258  0.47uF  [PART]  75.9,29.93 180 top
C259  0.1uF  [PART]  77.27,32.07 90 bottom
C260  0.1uF  [PART]  80.07,41.59 180 top
C261  0.1uF  [PART]  79.13,39.99 0 top
C262  0.1uF  [PART]  75.95,32.64 0 top
C263  0.1uF  [PART]  79.81,40.73 180 top
C264  10uF  [_0402MP]  71.38,42.58 180 top
C265  10uF  [_0402MP]  72.4,41.74 0 top
C266  0.1uF  [PART]  74.38,31.02 180 top
C267  10pF  [PART]  70.95,33.41 45 top
C268  10pF  [PART]  72.04,34.43 225 top
C269  22pF, C0G, 5%  [PART]  70.41,39.05 180 top
C270  22pF, C0G, 5%  [PART]  69.93,35.01 90 top
C271  DNP  [PART]  70.69,35.01 90 top
C272  9pF  [PART]  73.94,42.66 270 top
C273  9pF  [PART]  78.75,41.72 270 top
C274  10nF  [PART]  74.15,30.01 0 top
C275  0.1uF  [PART]  75.95,32.64 0 bottom
C276  0.1uF  [PART]  83.95,33.54 180 bottom
C277  0.1uF  [PART]  100.78,30.64 270 top
C278  0.1uF  [PART]  95.98,33.94 0 top
C279  2.2uF  [PART]  98.75,30.67 180 top
C280  2.2uF  [PART]  95.9,31.45 180 top
C281  0.47uF  [PART]  95.9,29.93 180 top
C282  0.1uF  [PART]  97.27,32.07 90 bottom
C283  0.1uF  [PART]  100.07,41.59 180 top
C284  0.1uF  [PART]  99.13,39.99 0 top
C285  0.1uF  [PART]  95.95,32.64 0 top
C286  0.1uF  [PART]  99.81,40.73 180 top
C287  10uF  [_0402MP]  91.38,42.58 180 top
C288  10uF  [_0402MP]  92.4,41.74 0 top
C289  0.1uF  [PART]  94.38,31.02 180 top
C290  10pF  [PART]  90.95,33.41 45 top
C291  10pF  [PART]  92.04,34.43 225 top
C292  22pF, C0G, 5%  [PART]  90.41,39.05 180 top
C293  22pF, C0G, 5%  [PART]  89.93,35.01 90 top
C294  DNP  [PART]  90.69,35.01 90 top
C295  9pF  [PART]  93.94,42.66 270 top
C296  9pF  [PART]  98.75,41.72 270 top
C297  10nF  [PART]  94.15,30.01 0 top
C298  0.1uF  [PART]  95.95,32.64 0 bottom
C299  0.1uF  [PART]  103.95,33.54 180 bottom
C300  0.1uF  [PART]  120.78,30.64 270 top
C301  0.1uF  [PART]  115.98,33.94 0 top
C302  2.2uF  [PART]  118.75,30.67 180 top
C303  2.2uF  [PART]  115.9,31.45 180 top
C304  0.47uF  [PART]  115.9,29.93 180 top
C305  0.1uF  [PART]  117.27,32.07 90 bottom
C306  0.1uF  [PART]  120.07,41.59 180 top
C307  0.1uF  [PART]  119.13,39.99 0 top
C308  0.1uF  [PART]  115.95,32.64 0 top
C309  0.1uF  [PART]  119.81,40.73 180 top
C310  10uF  [_0402MP]  111.38,42.58 180 top
C311  10uF  [_0402MP]  112.4,41.74 0 top
C312  0.1uF  [PART]  114.38,31.02 180 top
C313  10pF  [PART]  110.95,33.41 45 top
C314  10pF  [PART]  112.04,34.43 225 top
C315  22pF, C0G, 5%  [PART]  110.41,39.05 180 top
C316  22pF, C0G, 5%  [PART]  109.93,35.01 90 top
C317  DNP  [PART]  110.69,35.01 90 top
C318  9pF  [PART]  113.94,42.66 270 top
C319  9pF  [PART]  118.75,41.72 270 top
C320  10nF  [PART]  114.15,30.01 0 top
C321  0.1uF  [PART]  115.95,32.64 0 bottom
C322  0.1uF  [PART]  123.95,33.54 180 bottom
C323  0.1uF  [PART]  140.78,30.64 270 top
C324  0.1uF  [PART]  135.98,33.94 0 top
C325  2.2uF  [PART]  138.75,30.67 180 top
C326  2.2uF  [PART]  135.9,31.45 180 top
C327  0.47uF  [PART]  135.9,29.93 180 top
C328  0.1uF  [PART]  137.27,32.07 90 bottom
C329  0.1uF  [PART]  140.07,41.59 180 top
C330  0.1uF  [PART]  139.13,39.99 0 top
C331  0.1uF  [PART]  135.95,32.64 0 top
C332  0.1uF  [PART]  139.81,40.73 180 top
C333  10uF  [_0402MP]  131.38,42.58 180 top
C334  10uF  [_0402MP]  132.4,41.74 0 top
C335  0.1uF  [PART]  134.38,31.02 180 top
C336  10pF  [PART]  130.95,33.41 45 top
C337  10pF  [PART]  132.04,34.43 225 top
C338  22pF, C0G, 5%  [PART]  130.41,39.05 180 top
C339  22pF, C0G, 5%  [PART]  129.93,35.01 90 top
C340  DNP  [PART]  130.69,35.01 90 top
C341  9pF  [PART]  133.94,42.66 270 top
C342  9pF  [PART]  138.75,41.72 270 top
C343  10nF  [PART]  134.15,30.01 0 top
C344  0.1uF  [PART]  135.95,32.64 0 bottom
C345  0.1uF  [PART]  143.95,33.54 180 bottom
C346  0.1uF  [PART]  160.78,30.64 270 top
C347  0.1uF  [PART]  155.98,33.94 0 top
C348  2.2uF  [PART]  158.75,30.67 180 top
C349  2.2uF  [PART]  155.9,31.45 180 top
C350  0.47uF  [PART]  155.9,29.93 180 top
C351  0.1uF  [PART]  157.27,32.07 90 bottom
C352  0.1uF  [PART]  160.07,41.59 180 top
C353  0.1uF  [PART]  159.13,39.99 0 top
C354  0.1uF  [PART]  155.95,32.64 0 top
C355  0.1uF  [PART]  159.81,40.73 180 top
C356  10uF  [_0402MP]  151.38,42.58 180 top
C357  10uF  [_0402MP]  152.4,41.74 0 top
C358  0.1uF  [PART]  154.38,31.02 180 top
C359  10pF  [PART]  150.95,33.41 45 top
C360  10pF  [PART]  152.04,34.43 225 top
C361  22pF, C0G, 5%  [PART]  150.41,39.05 180 top
C362  22pF, C0G, 5%  [PART]  149.93,35.01 90 top
C363  DNP  [PART]  150.69,35.01 90 top
C364  9pF  [PART]  153.94,42.66 270 top
C365  9pF  [PART]  158.75,41.72 270 top
C366  10nF  [PART]  154.15,30.01 0 top
C367  0.1uF  [PART]  155.95,32.64 0 bottom
C368  0.1uF  [PART]  163.95,33.54 180 bottom
C369  0.1uF  [PART]  20.78,50.64 270 top
C370  0.1uF  [PART]  15.98,53.94 0 top
C371  2.2uF  [PART]  18.75,50.67 180 top
C372  2.2uF  [PART]  15.9,51.45 180 top
C373  0.47uF  [PART]  15.9,49.93 180 top
C374  0.1uF  [PART]  17.27,52.07 90 bottom
C375  0.1uF  [PART]  20.07,61.59 180 top
C376  0.1uF  [PART]  19.13,59.99 0 top
C377  0.1uF  [PART]  15.95,52.64 0 top
C378  0.1uF  [PART]  19.81,60.73 180 top
C379  10uF  [_0402MP]  11.38,62.58 180 top
C380  10uF  [_0402MP]  12.4,61.74 0 top
C381  0.1uF  [PART]  14.38,51.02 180 top
C382  10pF  [PART]  10.95,53.41 45 top
C383  10pF  [PART]  12.04,54.43 225 top
C384  22pF, C0G, 5%  [PART]  10.41,59.05 180 top
C385  22pF, C0G, 5%  [PART]  9.93,55.01 90 top
C386  DNP  [PART]  10.69,55.01 90 top
C387  9pF  [PART]  13.94,62.66 270 top
C388  9pF  [PART]  18.75,61.72 270 top
C389  10nF  [PART]  14.15,50.01 0 top
C390  0.1uF  [PART]  15.95,52.64 0 bottom
C391  0.1uF  [PART]  23.95,53.54 180 bottom
C392  0.1uF  [PART]  40.78,50.64 270 top
C393  0.1uF  [PART]  35.98,53.94 0 top
C394  2.2uF  [PART]  38.75,50.67 180 top
C395  2.2uF  [PART]  35.9,51.45 180 top
C396  0.47uF  [PART]  35.9,49.93 180 top
C397  0.1uF  [PART]  37.27,52.07 90 bottom
C398  0.1uF  [PART]  40.07,61.59 180 top
C399  0.1uF  [PART]  39.13,59.99 0 top
C400  0.1uF  [PART]  35.95,52.64 0 top
C401  0.1uF  [PART]  39.81,60.73 180 top
C402  10uF  [_0402MP]  31.38,62.58 180 top
C403  10uF  [_0402MP]  32.4,61.74 0 top
C404  0.1uF  [PART]  34.38,51.02 180 top
C405  10pF  [PART]  30.95,53.41 45 top
C406  10pF  [PART]  32.04,54.43 225 top
C407  22pF, C0G, 5%  [PART]  30.41,59.05 180 top
C408  22pF, C0G, 5%  [PART]  29.93,55.01 90 top
C409  DNP  [PART]  30.69,55.01 90 top
C410  9pF  [PART]  33.94,62.66 270 top
C411  9pF  [PART]  38.75,61.72 270 top
C412  10nF  [PART]  34.15,50.01 0 top
C413  0.1uF  [PART]  35.95,52.64 0 bottom
C414  0.1uF  [PART]  43.95,53.54 180 bottom
C415  0.1uF  [PART]  60.78,50.64 270 top
C416  0.1uF  [PART]  55.98,53.94 0 top
C417  2.2uF  [PART]  58.75,50.67 180 top
C418  2.2uF  [PART]  55.9,51.45 180 top
C419  0.47uF  [PART]  55.9,49.93 180 top
C420  0.1uF  [PART]  57.27,52.07 90 bottom
C421  0.1uF  [PART]  60.07,61.59 180 top
C422  0.1uF  [PART]  59.13,59.99 0 top
C423  0.1uF  [PART]  55.95,52.64 0 top
C424  0.1uF  [PART]  59.81,60.73 180 top
C425  10uF  [_0402MP]  51.38,62.58 180 top
C426  10uF  [_0402MP]  52.4,61.74 0 top
C427  0.1uF  [PART]  54.38,51.02 180 top
C428  10pF  [PART]  50.95,53.41 45 top
C429  10pF  [PART]  52.04,54.43 225 top
C430  22pF, C0G, 5%  [PART]  50.41,59.05 180 top
C431  22pF, C0G, 5%  [PART]  49.93,55.01 90 top
C432  DNP  [PART]  50.69,55.01 90 top
C433  9pF  [PART]  53.94,62.66 270 top
C434  9pF  [PART]  58.75,61.72 270 top
C435  10nF  [PART]  54.15,50.01 0 top
C436  0.1uF  [PART]  55.95,52.64 0 bottom
C437  0.1uF  [PART]  63.95,53.54 180 bottom
C438  0.1uF  [PART]  80.78,50.64 270 top
C439  0.1uF  [PART]  75.98,53.94 0 top
C440  2.2uF  [PART]  78.75,50.67 180 top
C441  2.2uF  [PART]  75.9,51.45 180 top
C442  0.47uF  [PART]  75.9,49.93 180 top
C443  0.1uF  [PART]  77.27,52.07 90 bottom
C444  0.1uF  [PART]  80.07,61.59 180 top
C445  0.1uF  [PART]  79.13,59.99 0 top
C446  0.1uF  [PART]  75.95,52.64 0 top
C447  0.1uF  [PART]  79.81,60.73 180 top
C448  10uF  [_0402MP]  71.38,62.58 180 top
C449  10uF  [_0402MP]  72.4,61.74 0 top
C450  0.1uF  [PART]  74.38,51.02 180 top
C451  10pF  [PART]  70.95,53.41 45 top
C452  10pF  [PART]  72.04,54.43 225 top
C453  22pF, C0G, 5%  [PART]  70.41,59.05 180 top
C454  22pF, C0G, 5%  [PART]  69.93,55.01 90 top
C455  DNP  [PART]  70.69,55.01 90 top
C456  9pF  [PART]  73.94,62.66 270 top
C457  9pF  [PART]  78.75,61.72 270 top
C458  10nF  [PART]  74.15,50.01 0 top
C459  0.1uF  [PART]  75.95,52.64 0 bottom
C460  0.1uF  [PART]  83.95,53.54 180 bottom
C461  0.1uF  [PART]  100.78,50.64 270 top
C462  0.1uF  [PART]  95.98,53.94 0 top
C463  2.2uF  [PART]  98.75,50.67 180 top
C464  2.2uF  [PART]  95.9,51.45 180 top
C465  0.47uF  [PART]  95.9,49.93 180 top
C466  0.1uF  [PART]  97.27,52.07 90 bottom
C467  0.1uF  [PART]  100.07,61.59 180 top
C468  0.1uF  [PART]  99.13,59.99 0 top
C469  0.1uF  [PART]  95.95,52.64 0 top
C470  0.1uF  [PART]  99.81,60.73 180 top
C471  10uF  [_0402MP]  91.38,62.58 180 top
C472  10uF  [_0402MP]  92.4,61.74 0 top
C473  0.1uF  [PART]  94.38,51.02 180 top
C474  10pF  [PART]  90.95,53.41 45 top
C475  10pF  [PART]  92.04,54.43 225 top
C476  22pF, C0G, 5%  [PART]  90.41,59.05 180 top
C477  22pF, C0G, 5%  [PART]  89.93,55.01 90 top
C478  DNP  [PART]  90.69,55.01 90 top
C479  9pF  [PART]  93.94,62.66 270 top
C480  9pF  [PART]  98.75,61.72 270 top
C481  10nF  [PART]  94.15,50.01 0 top
C482  0.1uF  [PART]  95.95,52.64 0 bottom
C483  0.1uF  [PART]  103.95,53.54 180 bottom
C484  0.1uF  [PART]  120.78,50.64 270 top
C485  0.1uF  [PART]  115.98,53.94 0 top
C486  2.2uF  [PART]  118.75,50.67 180 top
C487  2.2uF  [PART]  115.9,51.45 180 top
C488  0.47uF  [PART]  115.9,49.93 180 top
C489  0.1uF  [PART]  117.27,52.07 90 bottom
C490  0.1uF  [PART]  120.07,61.59 180 top
C491  0.1uF  [PART]  119.13,59.99 0 top
C492  0.1uF  [PART]  115.95,52.64 0 top
C493  0.1uF  [PART]  119.81,60.73 180 top
C494  10uF  [_0402MP]  111.38,62.58 180 top
C495  10uF  [_0402MP]  112.4,61.74 0 top
C496  0.1uF  [PART]  114.38,51.02 180 top
C497  10pF  [PART]  110.95,53.41 45 top
C498  10pF  [PART]  112.04,54.43 225 top
C499  22pF, C0G, 5%  [PART]  110.41,59.05 180 top
C500  22pF, C0G, 5%  [PART]  109.93,55.01 90 top
C501  DNP  [PART]  110.69,55.01 90 top
C502  9pF  [PART]  113.94,62.66 270 top
C503  9pF  [PART]  118.75,61.72 270 top
C504  10nF  [PART]  114.15,50.01 0 top
C505  0.1uF  [PART]  115.95,52.64 0 bottom
C506  0.1uF  [PART]  123.95,53.54 180 bottom
C507  0.1uF  [PART]  140.78,50.64 270 top
C508  0.1uF  [PART]  135.98,53.94 0 top
C509  2.2uF  [PART]  138.75,50.67 180 top
C510  2.2uF  [PART]  135.9,51.45 180 top
C511  0.47uF  [PART]  135.9,49.93 180 top
C512  0.1uF  [PART]  137.27,52.07 90 bottom
C513  0.1uF  [PART]  140.07,61.59 180 top
C514  0.1uF  [PART]  139.13,59.99 0 top
C515  0.1uF  [PART]  135.95,52.64 0 top
C516  0.1uF  [PART]  139.81,60.73 180 top
C517  10uF  [_0402MP]  131.38,62.58 180 top
C518  10uF  [_0402MP]  132.4,61.74 0 top
C519  0.1uF  [PART]  134.38,51.02 180 top
C520  10pF  [PART]  130.95,53.41 45 top
C521  10pF  [PART]  132.04,54.43 225 top
C522  22pF, C0G, 5%  [PART]  130.41,59.05 180 top
C523  22pF, C0G, 5%  [PART]  129.93,55.01 90 top
C524  DNP  [PART]  130.69,55.01 90 top
C525  9pF  [PART]  133.94,62.66 270 top
C526  9pF  [PART]  138.75,61.72 270 top
C527  10nF  [PART]  134.15,50.01 0 top
C528  0.1uF  [PART]  135.95,52.64 0 bottom
C529  0.1uF  [PART]  143.95,53.54 180 bottom
C530  0.1uF  [PART]  160.78,50.64 270 top
C531  0.1uF  [PART]  155.98,53.94 0 top
C532  2.2uF  [PART]  158.75,50.67 180 top
C533  2.2uF  [PART]  155.9,51.45 180 top
C534  0.47uF  [PART]  155.9,49.93 180 top
C535  0.1uF  [PART]  157.27,52.07 90 bottom
C536  0.1uF  [PART]  160.07,61.59 180 top
C537  0.1uF  [PART]  159.13,59.99 0 top
C538  0.1uF  [PART]  155.95,52.64 0 top
C539  0.1uF  [PART]  159.81,60.73 180 top
C540  10uF  [_0402MP]  151.38,62.58 180 top
C541  10uF  [_0402MP]  152.4,61.74 0 top
C542  0.1uF  [PART]  154.38,51.02 180 top
C543  10pF  [PART]  150.95,53.41 45 top
C544  10pF  [PART]  152.04,54.43 225 top
C545  22pF, C0G, 5%  [PART]  150.41,59.05 180 top
C546  22pF, C0G, 5%  [PART]  149.93,55.01 90 top
C547  DNP  [PART]  150.69,55.01 90 top
C548  9pF  [PART]  153.94,62.66 270 top
C549  9pF  [PART]  158.75,61.72 270 top
C550  10nF  [PART]  154.15,50.01 0 top
C551  0.1uF  [PART]  155.95,52.64 0 bottom
C552  0.1uF  [PART]  163.95,53.54 180 bottom
C553  0.1uF  [PART]  20.78,70.64 270 top
C554  0.1uF  [PART]  15.98,73.94 0 top
C555  2.2uF  [PART]  18.75,70.67 180 top
C556  2.2uF  [PART]  15.9,71.45 180 top
C557  0.47uF  [PART]  15.9,69.93 180 top
C558  0.1uF  [PART]  17.27,72.07 90 bottom
C559  0.1uF  [PART]  20.07,81.59 180 top
C560  0.1uF  [PART]  19.13,79.99 0 top
C561  0.1uF  [PART]  15.95,72.64 0 top
C562  0.1uF  [PART]  19.81,80.73 180 top
C563  10uF  [_0402MP]  11.38,82.58 180 top
C564  10uF  [_0402MP]  12.4,81.74 0 top
C565  0.1uF  [PART]  14.38,71.02 180 top
C566  10pF  [PART]  10.95,73.41 45 top
C567  10pF  [PART]  12.04,74.43 225 top
C568  22pF, C0G, 5%  [PART]  10.41,79.05 180 top
C569  22pF, C0G, 5%  [PART]  9.93,75.01 90 top
C570  DNP  [PART]  10.69,75.01 90 top
C571  9pF  [PART]  13.94,82.66 270 top
C572  9pF  [PART]  18.75,81.72 270 top
C573  10nF  [PART]  14.15,70.01 0 top
C574  0.1uF  [PART]  15.95,72.64 0 bottom
C575  0.1uF  [PART]  23.95,73.54 180 bottom
C576  0.1uF  [PART]  40.78,70.64 270 top
C577  0.1uF  [PART]  35.98,73.94 0 top
C578  2.2uF  [PART]  38.75,70.67 180 top
C579  2.2uF  [PART]  35.9,71.45 180 top
C580  0.47uF  [PART]  35.9,69.93 180 top
C581  0.1uF  [PART]  37.27,72.07 90 bottom
C582  0.1uF  [PART]  40.07,81.59 180 top
C583  0.1uF  [PART]  39.13,79.99 0 top
C584  0.1uF  [PART]  35.95,72.64 0 top
C585  0.1uF  [PART]  39.81,80.73 180 top
C586  10uF  [_0402MP]  31.38,82.58 180 top
C587  10uF  [_0402MP]  32.4,81.74 0 top
C588  0.1uF  [PART]  34.38,71.02 180 top
C589  10pF  [PART]  30.95,73.41 45 top
C590  10pF  [PART]  32.04,74.43 225 top
C591  22pF, C0G, 5%  [PART]  30.41,79.05 180 top
C592  22pF, C0G, 5%  [PART]  29.93,75.01 90 top
C593  DNP  [PART]  30.69,75.01 90 top
C594  9pF  [PART]  33.94,82.66 270 top
C595  9pF  [PART]  38.75,81.72 270 top
C596  10nF  [PART]  34.15,70.01 0 top
C597  0.1uF  [PART]  35.95,72.64 0 bottom
C598  0.1uF  [PART]  43.95,73.54 180 bottom
C599  0.1uF  [PART]  60.78,70.64 270 top
C600  0.1uF  [PART]  55.98,73.94 0 top
C601  2.2uF  [PART]  58.75,70.67 180 top
C602  2.2uF  [PART]  55.9,71.45 180 top
C603  0.47uF  [PART]  55.9,69.93 180 top
C604  0.1uF  [PART]  57.27,72.07 90 bottom
C605  0.1uF  [PART]  60.07,81.59 180 top
C606  0.1uF  [PART]  59.13,79.99 0 top
C607  0.1uF  [PART]  55.95,72.64 0 top
C608  0.1uF  [PART]  59.81,80.73 180 top
C609  10uF  [_0402MP]  51.38,82.58 180 top
C610  10uF  [_0402MP]  52.4,81.74 0 top
C611  0.1uF  [PART]  54.38,71.02 180 top
C612  10pF  [PART]  50.95,73.41 45 top
C613  10pF  [PART]  52.04,74.43 225 top
C614  22pF, C0G, 5%  [PART]  50.41,79.05 180 top
C615  22pF, C0G, 5%  [PART]  49.93,75.01 90 top
C616  DNP  [PART]  50.69,75.01 90 top
C617  9pF  [PART]  53.94,82.66 270 top
C618  9pF  [PART]  58.75,81.72 270 top
C619  10nF  [PART]  54.15,70.01 0 top
C620  0.1uF  [PART]  55.95,72.64 0 bottom
C621  0.1uF  [PART]  63.95,73.54 180 bottom
C622  0.1uF  [PART]  80.78,70.64 270 top
C623  0.1uF  [PART]  75.98,73.94 0 top
C624  2.2uF  [PART]  78.75,70.67 180 top
C625  2.2uF  [PART]  75.9,71.45 180 top
C626  0.47uF  [PART]  75.9,69.93 180 top
C627  0.1uF  [PART]  77.27,72.07 90 bottom
C628  0.1uF  [PART]  80.07,81.59 180 top
C629  0.1uF  [PART]  79.13,79.99 0 top
C630  0.1uF  [PART]  75.95,72.64 0 top
C631  0.1uF  [PART]  79.81,80.73 180 top
C632  10uF  [_0402MP]  71.38,82.58 180 top
C633  10uF  [_0402MP]  72.4,81.74 0 top
C634  0.1uF  [PART]  74.38,71.02 180 top
C635  10pF  [PART]  70.95,73.41 45 top
C636  10pF  [PART]  72.04,74.43 225 top
C637  22pF, C0G, 5%  [PART]  70.41,79.05 180 top
C638  22pF, C0G, 5%  [PART]  69.93,75.01 90 top
C639  DNP  [PART]  70.69,75.01 90 top
C640  9pF  [PART]  73.94,82.66 270 top
C641  9pF  [PART]  78.75,81.72 270 top
C642  10nF  [PART]  74.15,70.01 0 top
C643  0.1uF  [PART]  75.95,72.64 0 bottom
C644  0.1uF  [PART]  83.95,73.54 180 bottom
C645  0.1uF  [PART]  100.78,70.64 270 top
C646  0.1uF  [PART]  95.98,73.94 0 top
C647  2.2uF  [PART]  98.75,70.67 180 top
C648  2.2uF  [PART]  95.9,71.45 180 top
C649  0.47uF  [PART]  95.9,69.93 180 top
C650  0.1uF  [PART]  97.27,72.07 90 bottom
C651  0.1uF  [PART]  100.07,81.59 180 top
C652  0.1uF  [PART]  99.13,79.99 0 top
C653  0.1uF  [PART]  95.95,72.64 0 top
C654  0.1uF  [PART]  99.81,80.73 180 top
C655  10uF  [_0402MP]  91.38,82.58 180 top
C656  10uF  [_0402MP]  92.4,81.74 0 top
C657  0.1uF  [PART]  94.38,71.02 180 top
C658  10pF  [PART]  90.95,73.41 45 top
C659  10pF  [PART]  92.04,74.43 225 top
C660  22pF, C0G, 5%  [PART]  90.41,79.05 180 top
C661  22pF, C0G, 5%  [PART]  89.93,75.01 90 top
C662  DNP  [PART]  90.69,75.01 90 top
C663  9pF  [PART]  93.94,82.66 270 top
C664  9pF  [PART]  98.75,81.72 270 top
C665  10nF  [PART]  94.15,70.01 0 top
C666  0.1uF  [PART]  95.95,72.64 0 bottom
C667  0.1uF  [PART]  103.95,73.54 180 bottom
C668  0.1uF  [PART]  120.78,70.64 270 top
C669  0.1uF  [PART]  115.98,73.94 0 top
C670  2.2uF  [PART]  118.75,70.67 180 top
C671  2.2uF  [PART]  115.9,71.45 180 top
C672  0.47uF  [PART]  115.9,69.93 180 top
C673  0.1uF  [PART]  117.27,72.07 90 bottom
C674  0.1uF  [PART]  120.07,81.59 180 top
C675  0.1uF  [PART]  119.13,79.99 0 top
C676  0.1uF  [PART]  115.95,72.64 0 top
C677  0.1uF  [PART]  119.81,80.73 180 top
C678  10uF  [_0402MP]  111.38,82.58 180 top
C679  10uF  [_0402MP]  112.4,81.74 0 top
C680  0.1uF  [PART]  114.38,71.02 180 top
C681  10pF  [PART]  110.95,73.41 45 top
C682  10pF  [PART]  112.04,74.43 225 top
C683  22pF, C0G, 5%  [PART]  110.41,79.05 180 top
C684  22pF, C0G, 5%  [PART]  109.93,75.01 90 top
C685  DNP  [PART]  110.69,75.01 90 top
C686  9pF  [PART]  113.94,82.66 270 top
C687  9pF  [PART]  118.75,81.72 270 top
C688  10nF  [PART]  114.15,70.01 0 top
C689  0.1uF  [PART]  115.95,72.64 0 bottom
C690  0.1uF  [PART]  123.95,73.54 180 bottom
C691  0.1uF  [PART]  140.78,70.64 270 top
C692  0.1uF  [PART]  135.98,73.94 0 top
C693  2.2uF  [PART]  138.75,70.67 180 top
C694  2.2uF  [PART]  135.9,71.45 180 top
C695  0.47uF  [PART]  135.9,69.93 180 top
C696  0.1uF  [PART]  137.27,72.07 90 bottom
C697  0.1uF  [PART]  140.07,81.59 180 top
C698  0.1uF  [PART]  139.13,79.99 0 top
C699  0.1uF  [PART]  135.95,72.64 0 top
C700  0.1uF  [PART]  139.81,80.73 180 top
C701  10uF  [_0402MP]  131.38,82.58 180 top
C702  10uF  [_0402MP]  132.4,81.74 0 top
C703  0.1uF  [PART]  134.38,71.02 180 top
C704  10pF  [PART]  130.95,73.41 45 top
C705  10pF  [PART]  132.04,74.43 225 top
C706  22pF, C0G, 5%  [PART]  130.41,79.05 180 top
C707  22pF, C0G, 5%  [PART]  129.93,75.01 90 top
C708  DNP  [PART]  130.69,75.01 90 top
C709  9pF  [PART]  133.94,82.66 270 top
C710  9pF  [PART]  138.75,81.72 270 top
C711  10nF  [PART]  134.15,70.01 0 top
C712  0.1uF  [PART]  135.95,72.64 0 bottom
C713  0.1uF  [PART]  143.95,73.54 180 bottom
C714  0.1uF  [PART]  160.78,70.64 270 top
C715  0.1uF  [PART]  155.98,73.94 0 top
C716  2.2uF  [PART]  158.75,70.67 180 top
C717  2.2uF  [PART]  155.9,71.45 180 top
C718  0.47uF  [PART]  155.9,69.93 180 top
C719  0.1uF  [PART]  157.27,72.07 90 bottom
C720  0.1uF  [PART]  160.07,81.59 180 top
C721  0.1uF  [PART]  159.13,79.99 0 top
C722  0.1uF  [PART]  155.95,72.64 0 top
C723  0.1uF  [PART]  159.81,80.73 180 top
C724  10uF  [_0402MP]  151.38,82.58 180 top
C725  10uF  [_0402MP]  152.4,81.74 0 top
C726  0.1uF  [PART]  154.38,71.02 180 top
C727  10pF  [PART]  150.95,73.41 45 top
C728  10pF  [PART]  152.04,74.43 225 top
C729  22pF, C0G, 5%  [PART]  150.41,79.05 180 top
C730  22pF, C0G, 5%  [PART]  149.93,75.01 90 top
C731  DNP  [PART]  150.69,75.01 90 top
C732  9pF  [PART]  153.94,82.66 270 top
C733  9pF  [PART]  158.75,81.72 270 top
C734  10nF  [PART]  154.15,70.01 0 top
C735  0.1uF  [PART]  155.95,72.64 0 bottom
C736  0.1uF  [PART]  163.95,73.54 180 bottom
C737  0.1uF  [PART]  20.78,90.64 270 top
C738  0.1uF  [PART]  15.98,93.94 0 top
C739  2.2uF  [PART]  18.75,90.67 180 top
C740  2.2uF  [PART]  15.9,91.45 180 top
C741  0.47uF  [PART]  15.9,89.93 180 top
C742  0.1uF  [PART]  17.27,92.07 90 bottom
C743  0.1uF  [PART]  20.07,101.59 180 top
C744  0.1uF  [PART]  19.13,99.99 0 top
C745  0.1uF  [PART]  15.95,92.64 0 top
C746  0.1uF  [PART]  19.81,100.73 180 top
C747  10uF  [_0402MP]  11.38,102.58 180 top
C748  10uF  [_0402MP]  12.4,101.74 0 top
C749  0.1uF  [PART]  14.38,91.02 180 top
C750  10pF  [PART]  10.95,93.41 45 top
C751  10pF  [PART]  12.04,94.43 225 top
C752  22pF, C0G, 5%  [PART]  10.41,99.05 180 top
C753  22pF, C0G, 5%  [PART]  9.93,95.01 90 top
C754  DNP  [PART]  10.69,95.01 90 top
C755  9pF  [PART]  13.94,102.66 270 top
C756  9pF  [PART]  18.75,101.72 270 top
C757  10nF  [PART]  14.15,90.01 0 top
C758  0.1uF  [PART]  15.95,92.64 0 bottom
C759  0.1uF  [PART]  23.95,93.54 180 bottom
C760  0.1uF  [PART]  40.78,90.64 270 top
C761  0.1uF  [PART]  35.98,93.94 0 top
C762  2.2uF  [PART]  38.75,90.67 180 top
C763  2.2uF  [PART]  35.9,91.45 180 top
C764  0.47uF  [PART]  35.9,89.93 180 top
C765  0.1uF  [PART]  37.27,92.07 90 bottom
C766  0.1uF  [PART]  40.07,101.59 180 top
C767  0.1uF  [PART]  39.13,99.99 0 top
C768  0.1uF  [PART]  35.95,92.64 0 top
C769  0.1uF  [PART]  39.81,100.73 180 top
C770  10uF  [_0402MP]  31.38,102.58 180 top
C771  10uF  [_0402MP]  32.4,101.74 0 top
C772  0.1uF  [PART]  34.38,91.02 180 top
C773  10pF  [PART]  30.95,93.41 45 top
C774  10pF  [PART]  32.04,94.43 225 top
C775  22pF, C0G, 5%  [PART]  30.41,99.05 180 top
C776  22pF, C0G, 5%  [PART]  29.93,95.01 90 top
C777  DNP  [PART]  30.69,95.01 90 top
C778  9pF  [PART]  33.94,102.66 270 top
C779  9pF  [PART]  38.75,101.72 270 top
C780  10nF  [PART]  34.15,90.01 0 top
C781  0.1uF  [PART]  35.95,92.64 0 bottom
C782  0.1uF  [PART]  43.95,93.54 180 bottom
C783  0.1uF  [PART]  60.78,90.64 270 top
C784  0.1uF  [PART]  55.98,93.94 0 top
C785  2.2uF  [PART]  58.75,90.67 180 top
C786  2.2uF  [PART]  55.9,91.45 180 top
C787  0.47uF  [PART]  55.9,89.93 180 top
C788  0.1uF  [PART]  57.27,92.07 90 bottom
C789  0.1uF  [PART]  60.07,101.59 180 top
C790  0.1uF  [PART]  59.13,99.99 0 top
C791  0.1uF  [PART]  55.95,92.64 0 top
C792  0.1uF  [PART]  59.81,100.73 180 top
C793  10uF  [_0402MP]  51.38,102.58 180 top
C794  10uF  [_0402MP]  52.4,101.74 0 top
C795  0.1uF  [PART]  54.38,91.02 180 top
C796  10pF  [PART]  50.95,93.41 45 top
C797  10pF  [PART]  52.04,94.43 225 top
C798  22pF, C0G, 5%  [PART]  50.41,99.05 180 top
C799  22pF, C0G, 5%  [PART]  49.93,95.01 90 top
C800  DNP  [PART]  50.69,95.01 90 top
C801  9pF  [PART]  53.94,102.66 270 top
C802  9pF  [PART]  58.75,101.72 270 top
C803  10nF  [PART]  54.15,90.01 0 top
C804  0.1uF  [PART]  55.95,92.64 0 bottom
C805  0.1uF  [PART]  63.95,93.54 180 bottom
C806  0.1uF  [PART]  80.78,90.64 270 top
C807  0.1uF  [PART]  75.98,93.94 0 top
C808  2.2uF  [PART]  78.75,90.67 180 top
C809  2.2uF  [PART]  75.9,91.45 180 top
C810  0.47uF  [PART]  75.9,89.93 180 top
C811  0.1uF  [PART]  77.27,92.07 90 bottom
C812  0.1uF  [PART]  80.07,101.59 180 top
C813  0.1uF  [PART]  79.13,99.99 0 top
C814  0.1uF  [PART]  75.95,92.64 0 top
C815  0.1uF  [PART]  79.81,100.73 180 top
C816  10uF  [_0402MP]  71.38,102.58 180 top
C817  10uF  [_0402MP]  72.4,101.74 0 top
C818  0.1uF  [PART]  74.38,91.02 180 top
C819  10pF  [PART]  70.95,93.41 45 top
C820  10pF  [PART]  72.04,94.43 225 top
C821  22pF, C0G, 5%  [PART]  70.41,99.05 180 top
C822  22pF, C0G, 5%  [PART]  69.93,95.01 90 top
C823  DNP  [PART]  70.69,95.01 90 top
C824  9pF  [PART]  73.94,102.66 270 top
C825  9pF  [PART]  78.75,101.72 270 top
C826  10nF  [PART]  74.15,90.01 0 top
C827  0.1uF  [PART]  75.95,92.64 0 bottom
C828  0.1uF  [PART]  83.95,93.54 180 bottom
C829  0.1uF  [PART]  100.78,90.64 270 top
C830  0.1uF  [PART]  95.98,93.94 0 top
C831  2.2uF  [PART]  98.75,90.67 180 top
C832  2.2uF  [PART]  95.9,91.45 180 top
C833  0.47uF  [PART]  95.9,89.93 180 top
C834  0.1uF  [PART]  97.27,92.07 90 bottom
C835  0.1uF  [PART]  100.07,101.59 180 top
C836  0.1uF  [PART]  99.13,99.99 0 top
C837  0.1uF  [PART]  95.95,92.64 0 top
C838  0.1uF  [PART]  99.81,100.73 180 top
C839  10uF  [_0402MP]  91.38,102.58 180 top
C840  10uF  [_0402MP]  92.4,101.74 0 top
C841  0.1uF  [PART]  94.38,91.02 180 top
C842  10pF  [PART]  90.95,93.41 45 top
C843  10pF  [PART]  92.04,94.43 225 top
C844  22pF, C0G, 5%  [PART]  90.41,99.05 180 top
C845  22pF, C0G, 5%  [PART]  89.93,95.01 90 top
C846  DNP  [PART]  90.69,95.01 90 top
C847  9pF  [PART]  93.94,102.66 270 top
C848  9pF  [PART]  98.75,101.72 270 top
C849  10nF  [PART]  94.15,90.01 0 top
C850  0.1uF  [PART]  95.95,92.64 0 bottom
C851  0.1uF  [PART]  103.95,93.54 180 bottom
C852  0.1uF  [PART]  120.78,90.64 270 top
C853  0.1uF  [PART]  115.98,93.94 0 top
C854  2.2uF  [PART]  118.75,90.67 180 top
C855  2.2uF  [PART]  115.9,91.45 180 top
C856  0.47uF  [PART]  115.9,89.93 180 top
C857  0.1uF  [PART]  117.27,92.07 90 bottom
C858  0.1uF  [PART]  120.07,101.59 180 top
C859  0.1uF  [PART]  119.13,99.99 0 top
C860  0.1uF  [PART]  115.95,92.64 0 top
C861  0.1uF  [PART]  119.81,100.73 180 top
C862  10uF  [_0402MP]  111.38,102.58 180 top
C863  10uF  [_0402MP]  112.4,101.74 0 top
C864  0.1uF  [PART]  114.38,91.02 180 top
C865  10pF  [PART]  110.95,93.41 45 top
C866  10pF  [PART]  112.04,94.43 225 top
C867  22pF, C0G, 5%  [PART]  110.41,99.05 180 top
C868  22pF, C0G, 5%  [PART]  109.93,95.01 90 top
C869  DNP  [PART]  110.69,95.01 90 top
C870  9pF  [PART]  113.94,102.66 270 top
C871  9pF  [PART]  118.75,101.72 270 top
C872  10nF  [PART]  114.15,90.01 0 top
C873  0.1uF  [PART]  115.95,92.64 0 bottom
C874  0.1uF  [PART]  123.95,93.54 180 bottom
C875  0.1uF  [PART]  140.78,90.64 270 top
C876  0.1uF  [PART]  135.98,93.94 0 top
C877  2.2uF  [PART]  138.75,90.67 180 top
C878  2.2uF  [PART]  135.9,91.45 180 top
C879  0.47uF  [PART]  135.9,89.93 180 top
C880  0.1uF  [PART]  137.27,92.07 90 bottom
C881  0.1uF  [PART]  140.07,101.59 180 top
C882  0.1uF  [PART]  139.13,99.99 0 top
C883  0.1uF  [PART]  135.95,92.64 0 top
C884  0.1uF  [PART]  139.81,100.73 180 top
C885  10uF  [_0402MP]  131.38,102.58 180 top
C886  10uF  [_0402MP]  132.4,101.74 0 top
C887  0.1uF  [PART]  134.38,91.02 180 top
C888  10pF  [PART]  130.95,93.41 45 top
C889  10pF  [PART]  132.04,94.43 225 top
C890  22pF, C0G, 5%  [PART]  130.41,99.05 180 top
C891  22pF, C0G, 5%  [PART]  129.93,95.01 90 top
C892  DNP  [PART]  130.69,95.01 90 top
C893  9pF  [PART]  133.94,102.66 270 top
C894  9pF  [PART]  138.75,101.72 270 top
C895  10nF  [PART]  134.15,90.01 0 top
C896  0.1uF  [PART]  135.95,92.64 0 bottom
C897  0.1uF  [PART]  143.95,93.54 180 bottom
C898  0.1uF  [PART]  160.78,90.64 270 top
C899  0.1uF  [PART]  155.98,93.94 0 top
C900  2.2uF  [PART]  158.75,90.67 180 top
C901  2.2uF  [PART]  155.9,91.45 180 top
C902  0.47uF  [PART]  155.9,89.93 180 top
C903  0.1uF  [PART]  157.27,92.07 90 bottom
C904  0.1uF  [PART]  160.07,101.59 180 top
C905  0.1uF  [PART]  159.13,99.99 0 top
C906  0.1uF  [PART]  155.95,92.64 0 top
C907  0.1uF  [PART]  159.81,100.73 180 top
C908  10uF  [_0402MP]  151.38,102.58 180 top
C909  10uF  [_0402MP]  152.4,101.74 0 top
C910  0.1uF  [PART]  154.38,91.02 180 top
C911  10pF  [PART]  150.95,93.41 45 top
C912  10pF  [PART]  152.04,94.43 225 top
C913  22pF, C0G, 5%  [PART]  150.41,99.05 180 top
C914  22pF, C0G, 5%  [PART]  149.93,95.01 90 top
C915  DNP  [PART]  150.69,95.01 90 top
C916  9pF  [PART]  153.94,102.66 270 top
C917  9pF  [PART]  158.75,101.72 270 top
C918  10nF  [PART]  154.15,90.01 0 top
C919  0.1uF  [PART]  155.95,92.64 0 bottom
C920  0.1uF  [PART]  163.95,93.54 180 bottom
FB1  [_0603MP]  19.2,12.62 180 top
FB2  [_0603MP]  39.2,12.62 180 top
FB3  [_0603MP]  59.2,12.62 180 top
FB4  [_0603MP]  79.2,12.62 180 top
FB5  [_0603MP]  99.2,12.62 180 top
FB6  [_0603MP]  119.2,12.62 180 top
FB7  [_0603MP]  139.2,12.62 180 top
FB8  [_0603MP]  159.2,12.62 180 top
FB9  [_0603MP]  19.2,32.62 180 top
FB10  [_0603MP]  39.2,32.62 180 top
FB11  [_0603MP]  59.2,32.62 180 top
FB12  [_0603MP]  79.2,32.62 180 top
FB13  [_0603MP]  99.2,32.62 180 top
FB14  [_0603MP]  119.2,32.62 180 top
FB15  [_0603MP]  139.2,32.62 180 top
FB16  [_0603MP]  159.2,32.62 180 top
FB17  [_0603MP]  19.2,52.62 180 top
FB18  [_0603MP]  39.2,52.62 180 top
FB19  [_0603MP]  59.2,52.62 180 top
FB20  [_0603MP]  79.2,52.62 180 top
FB21  [_0603MP]  99.2,52.62 180 top
FB22  [_0603MP]  119.2,52.62 180 top
FB23  [_0603MP]  139.2,52.62 180 top
FB24  [_0603MP]  159.2,52.62 180 top
FB25  [_0603MP]  19.2,72.62 180 top
FB26  [_0603MP]  39.2,72.62 180 top
FB27  [_0603MP]  59.2,72.62 180 top
FB28  [_0603MP]  79.2,72.62 180 top
FB29  [_0603MP]  99.2,72.62 180 top
FB30  [_0603MP]  119.2,72.62 180 top
FB31  [_0603MP]  139.2,72.62 180 top
FB32  [_0603MP]  159.2,72.62 180 top
FB33  [_0603MP]  19.2,92.62 180 top
FB34  [_0603MP]  39.2,92.62 180 top
FB35  [_0603MP]  59.2,92.62 180 top
FB36  [_0603MP]  79.2,92.62 180 top
FB37  [_0603MP]  99.2,92.62 180 top
FB38  [_0603MP]  119.2,92.62 180 top
FB39  [_0603MP]  139.2,92.62 180 top
FB40  [_0603MP]  159.2,92.62 180 top
FIDUCIAL1  [FIDUCIAL_1MM]  10.16,2.54 0 top
FIDUCIAL2  [FIDUCIAL_1MM]  207.92,112.85 0 top
FIDUCIAL3  [FIDUCIAL_1MM]  207.92,2.54 0 top
FIDUCIAL4  [FIDUCIAL_1MM]  10.16,112.85 0 top
L1  10uH  [_0603MP]  31.51,20.8 0 top
L2  10uH  [_0603MP]  51.51,20.8 0 top
L3  10uH  [_0603MP]  71.51,20.8 0 top
L4  10uH  [_0603MP]  91.51,20.8 0 top
L5  10uH  [_0603MP]  111.51,20.8 0 top
L6  10uH  [_0603MP]  11.51,20.8 0 top
L7  10uH  [_0603MP]  131.51,20.8 0 top
L8  10uH  [_0603MP]  151.51,20.8 0 top
L9  10uH  [_0603MP]  11.51,40.8 0 top
L10  10uH  [_0603MP]  31.51,40.8 0 top
L11  10uH  [_0603MP]  51.51,40.8 0 top
L12  10uH  [_0603MP]  71.51,40.8 0 top
L13  10uH  [_0603MP]  91.51,40.8 0 top
L14  10uH  [_0603MP]  111.51,40.8 0 top
L15  10uH  [_0603MP]  131.51,40.8 0 top
L16  10uH  [_0603MP]  151.51,40.8 0 top
L17  10uH  [_0603MP]  11.51,60.8 0 top
L18  10uH  [_0603MP]  31.51,60.8 0 top
L19  10uH  [_0603MP]  51.51,60.8 0 top
L20  10uH  [_0603MP]  71.51,60.8 0 top
L21  10uH  [_0603MP]  91.51,60.8 0 top
L22  10uH  [_0603MP]  111.51,60.8 0 top
L23  10uH  [_0603MP]  131.51,60.8 0 top
L24  10uH  [_0603MP]  151.51,60.8 0 top
L25  10uH  [_0603MP]  11.51,80.8 0 top
L26  10uH  [_0603MP]  31.51,80.8 0 top
L27  10uH  [_0603MP]  51.51,80.8 0 top
L28  10uH  [_0603MP]  71.51,80.8 0 top
L29  10uH  [_0603MP]  91.51,80.8 0 top
L30  10uH  [_0603MP]  111.51,80.8 0 top
L31  10uH  [_0603MP]  131.51,80.8 0 top
L32  10uH  [_0603MP]  151.51,80.8 0 top
L33  10uH  [_0603MP]  11.51,100.8 0 top
L34  10uH  [_0603MP]  31.51,100.8 0 top
L35  10uH  [_0603MP]  51.51,100.8 0 top
L36  10uH  [_0603MP]  71.51,100.8 0 top
L37  10uH  [_0603MP]  91.51,100.8 0 top
L38  10uH  [_0603MP]  111.51,100.8 0 top
L39  10uH  [_0603MP]  131.51,100.8 0 top
L40  10uH  [_0603MP]  151.51,100.8 0 top
LDO_VREG  MCP1700T-3302E/TT  [MCP1700T-3302E/TT]  17.26,10.69 90 top
LDO_VREG1  MCP1700T-3302E/TT  [MCP1700T-3302E/TT]  37.26,10.69 90 top
LDO_VREG2  MCP1700T-3302E/TT  [MCP1700T-3302E/TT]  57.26,10.69 90 top
LDO_VREG3  MCP1700T-3302E/TT  [MCP1700T-3302E/TT]  77.26,10.69 90 top
LDO_VREG4  MCP1700T-3302E/TT  [MCP1700T-3302E/TT]  97.26,10.69 90 top
LDO_VREG5  MCP1700T-3302E/TT  [MCP1700T-3302E/TT]  117.26,10.69 90 top